# Altium PCB BMS PCB.PcbDoc (part 1 of 2)
Units mm, origin at the board's own origin, x right, y up, seen from the top; angles counter-clockwise.
Board outline 90 x 100 mm, 4 copper layers (Top Layer, Layer 1, Layer 2, Bottom Layer), stack 0.603 mm thick; 82 components, 43 nets, 216 pads, 71 vias.
Unrouted connection lines stored in the file: 2.
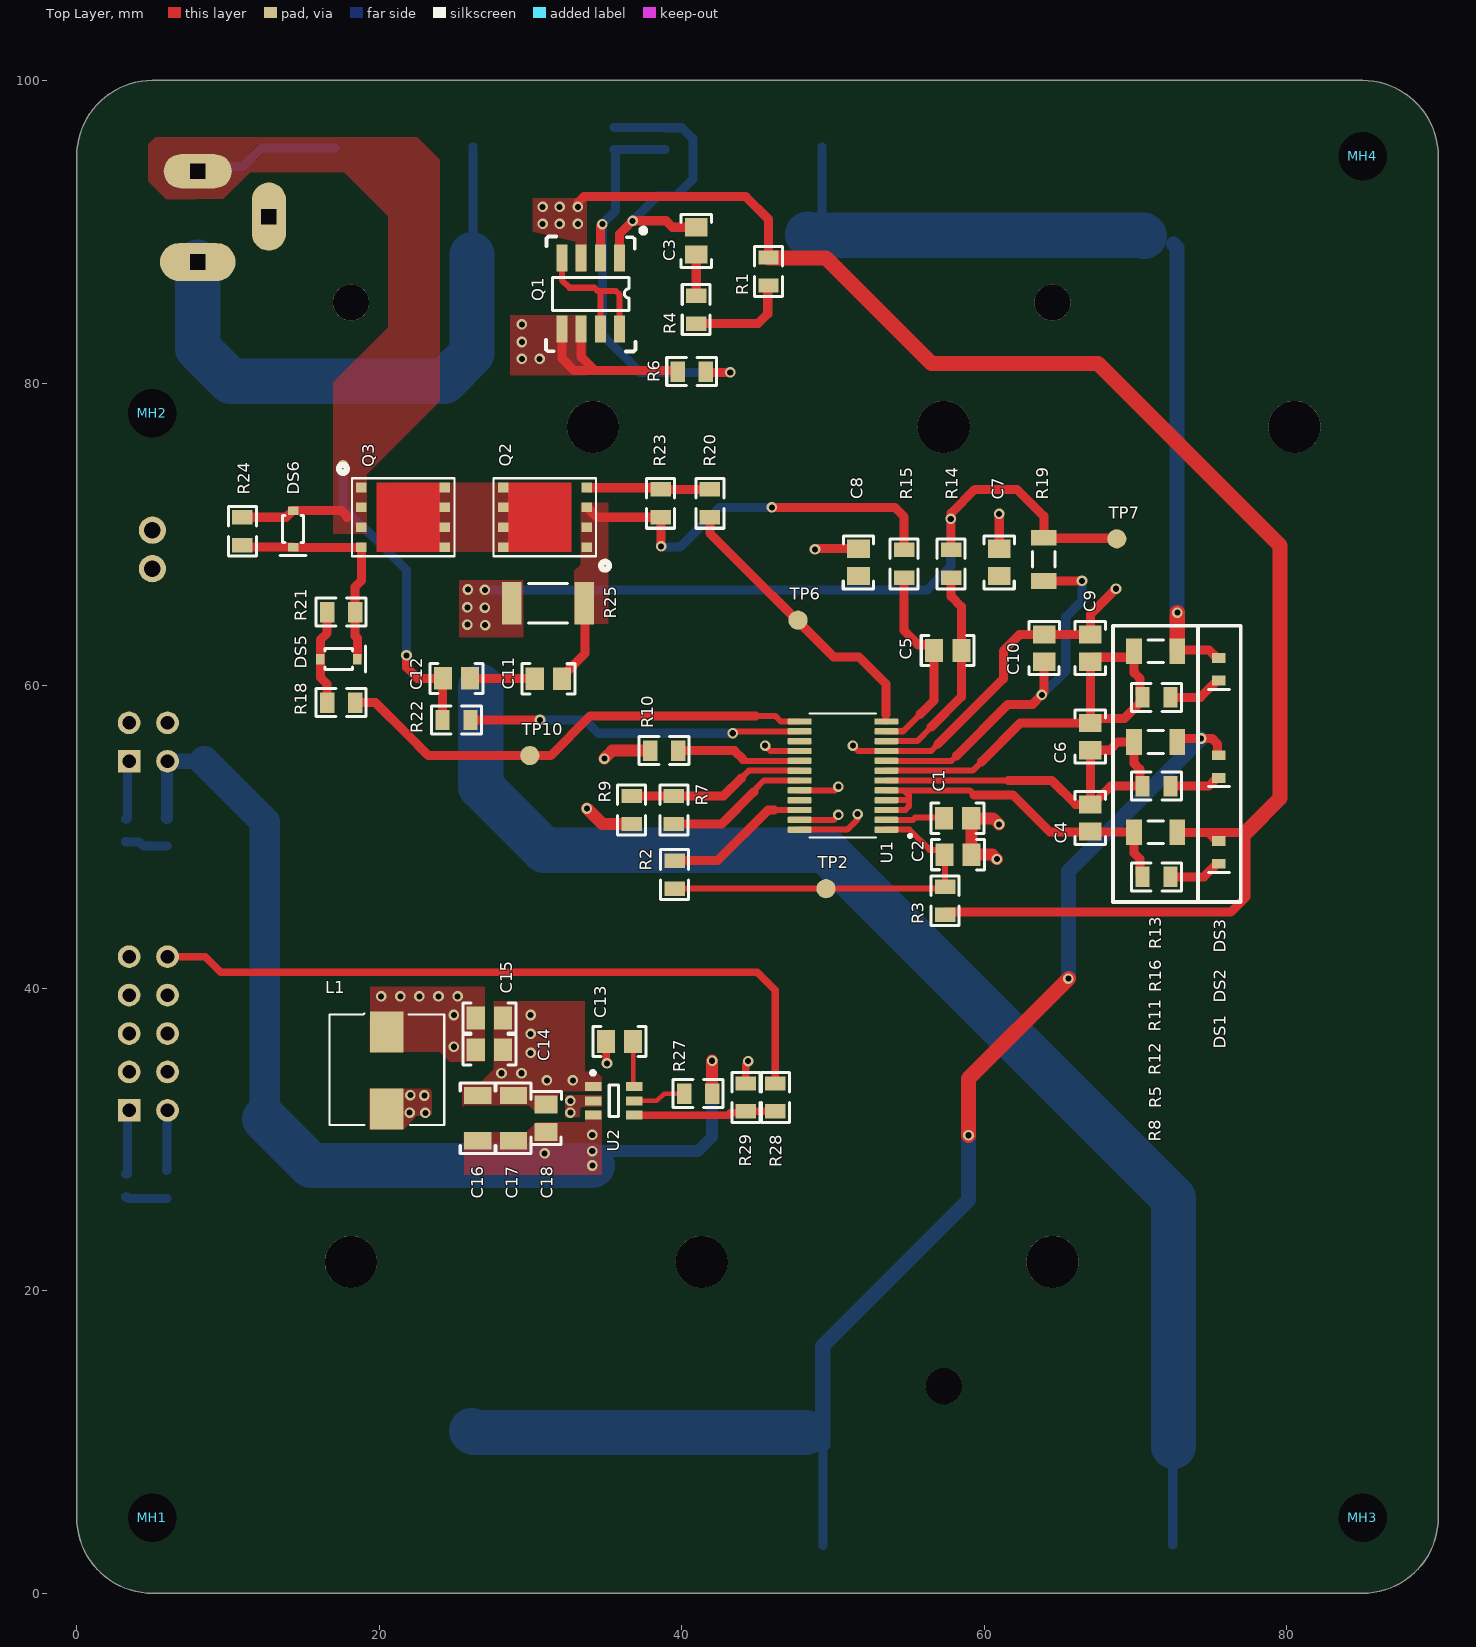
[diagram p0: Top Layer view]
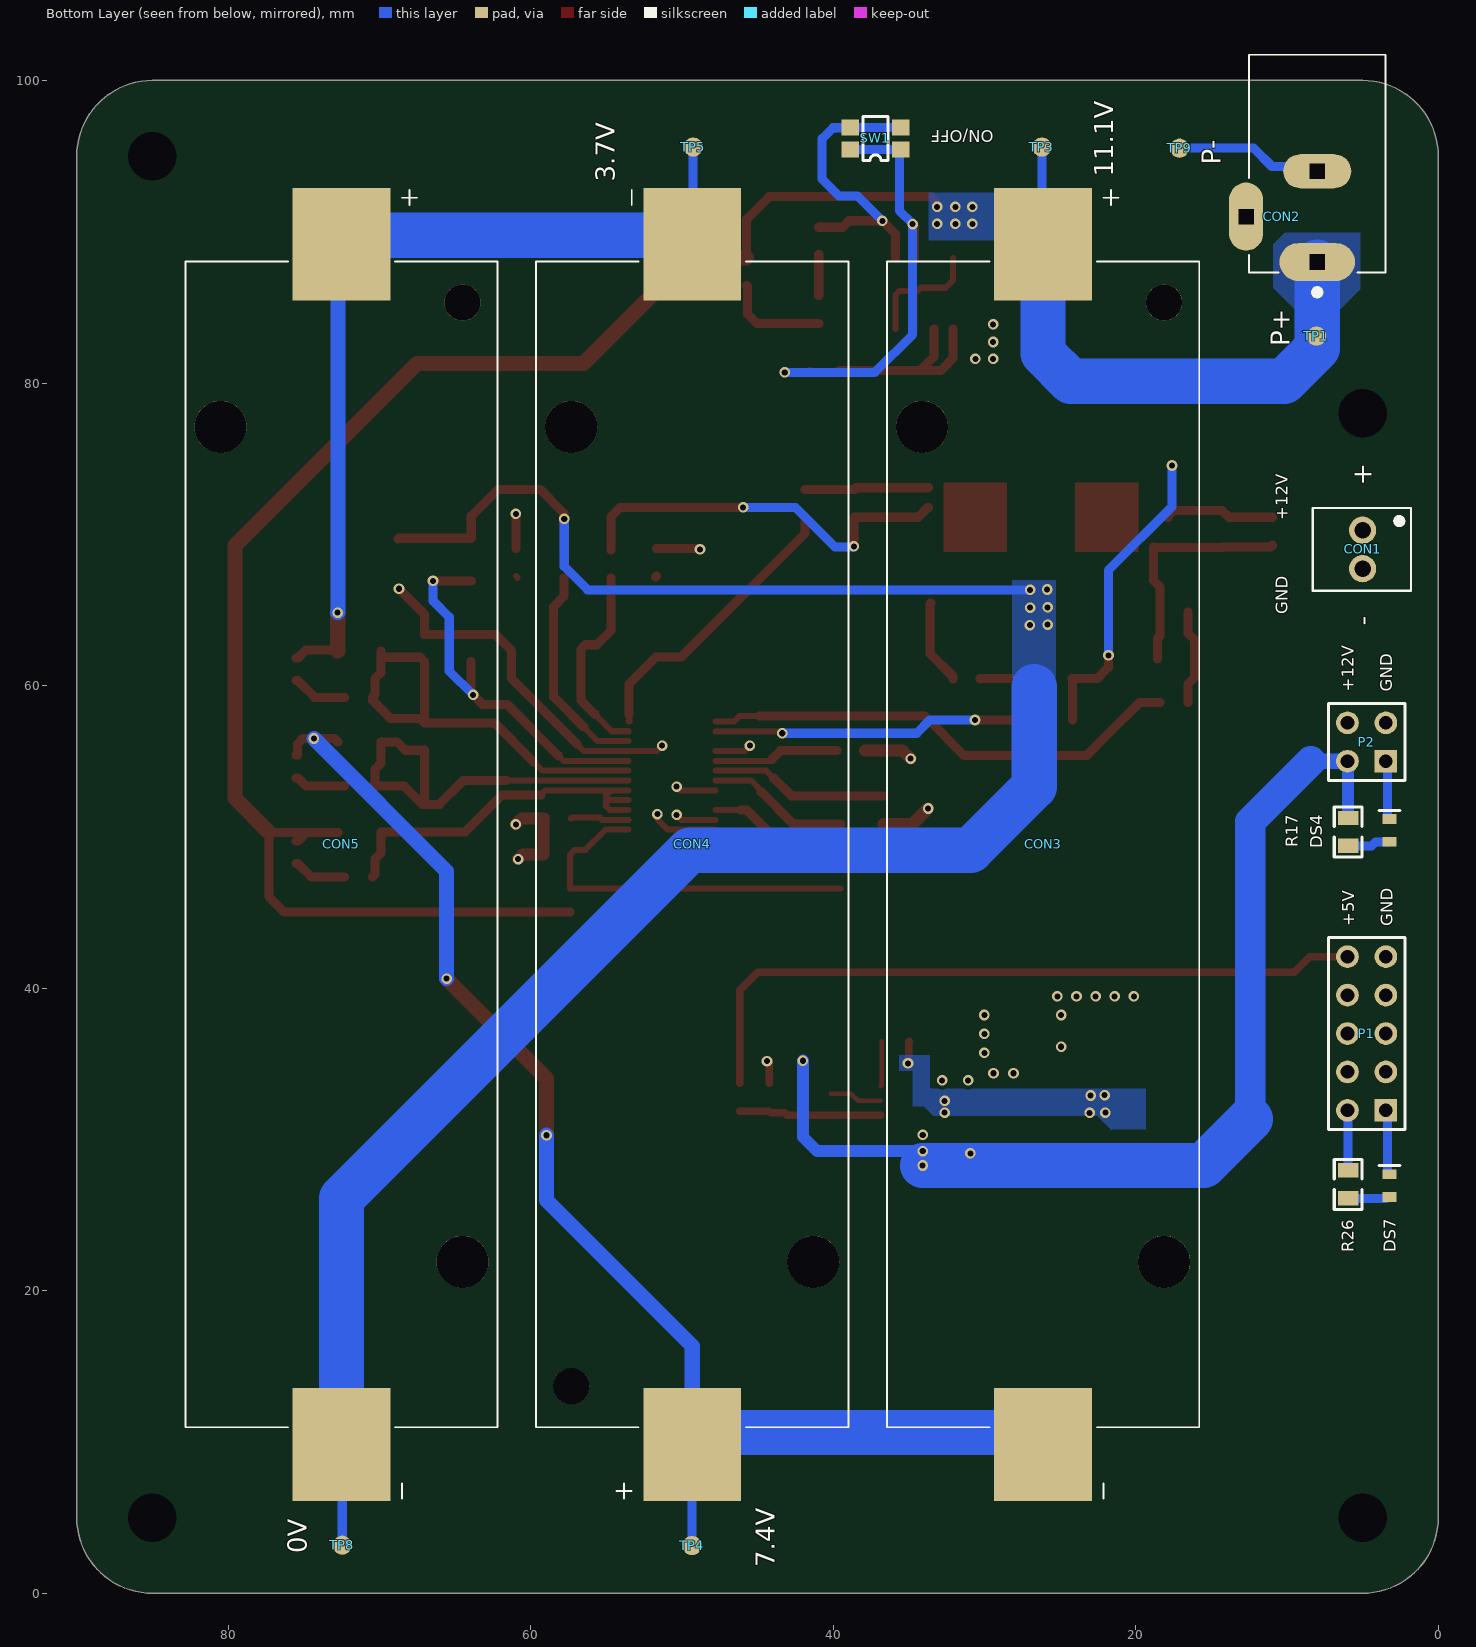
[diagram p1: Bottom Layer view, seen from below]
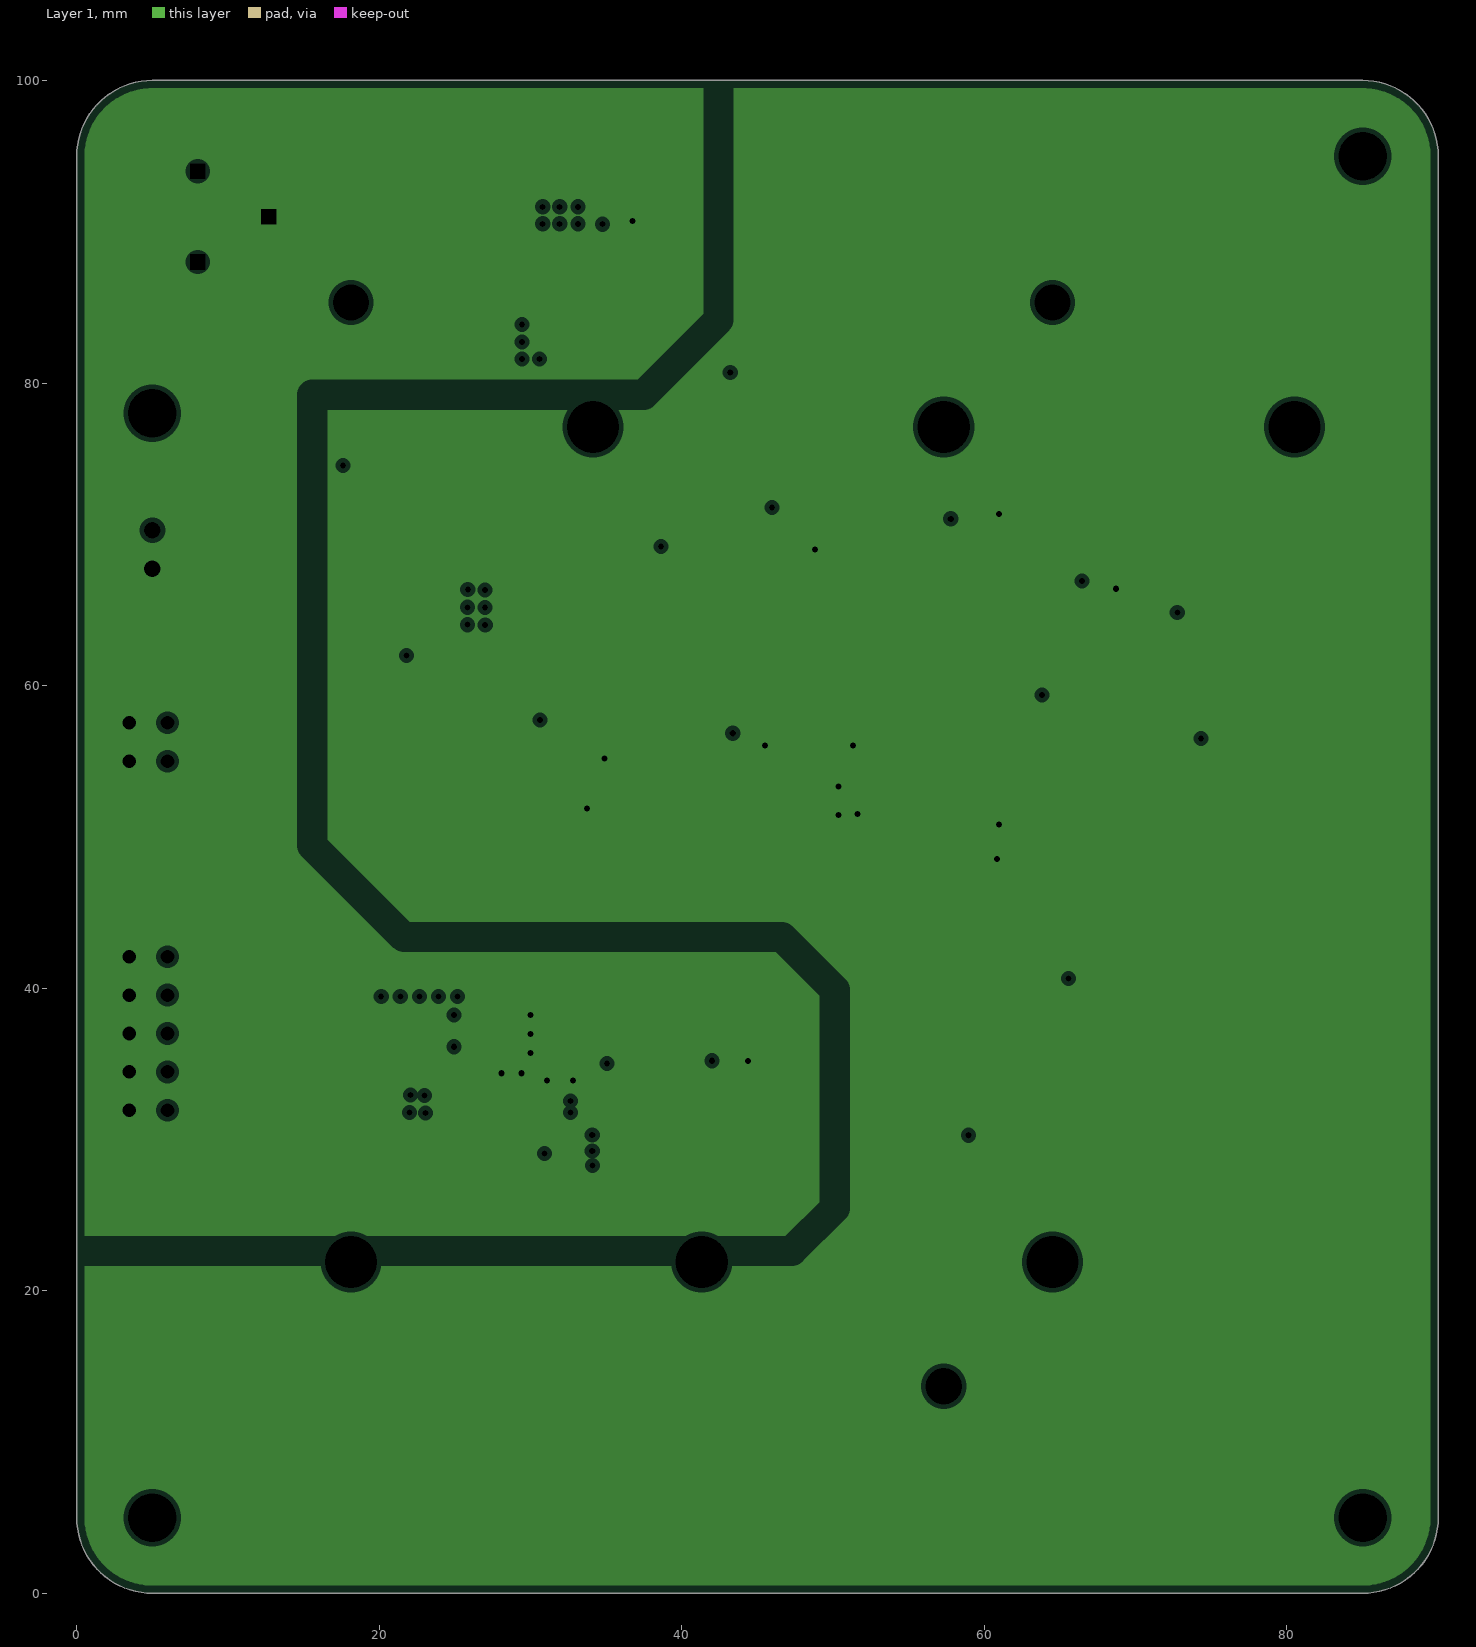
[diagram p2: Layer 1, clearances drawn from the general rule]
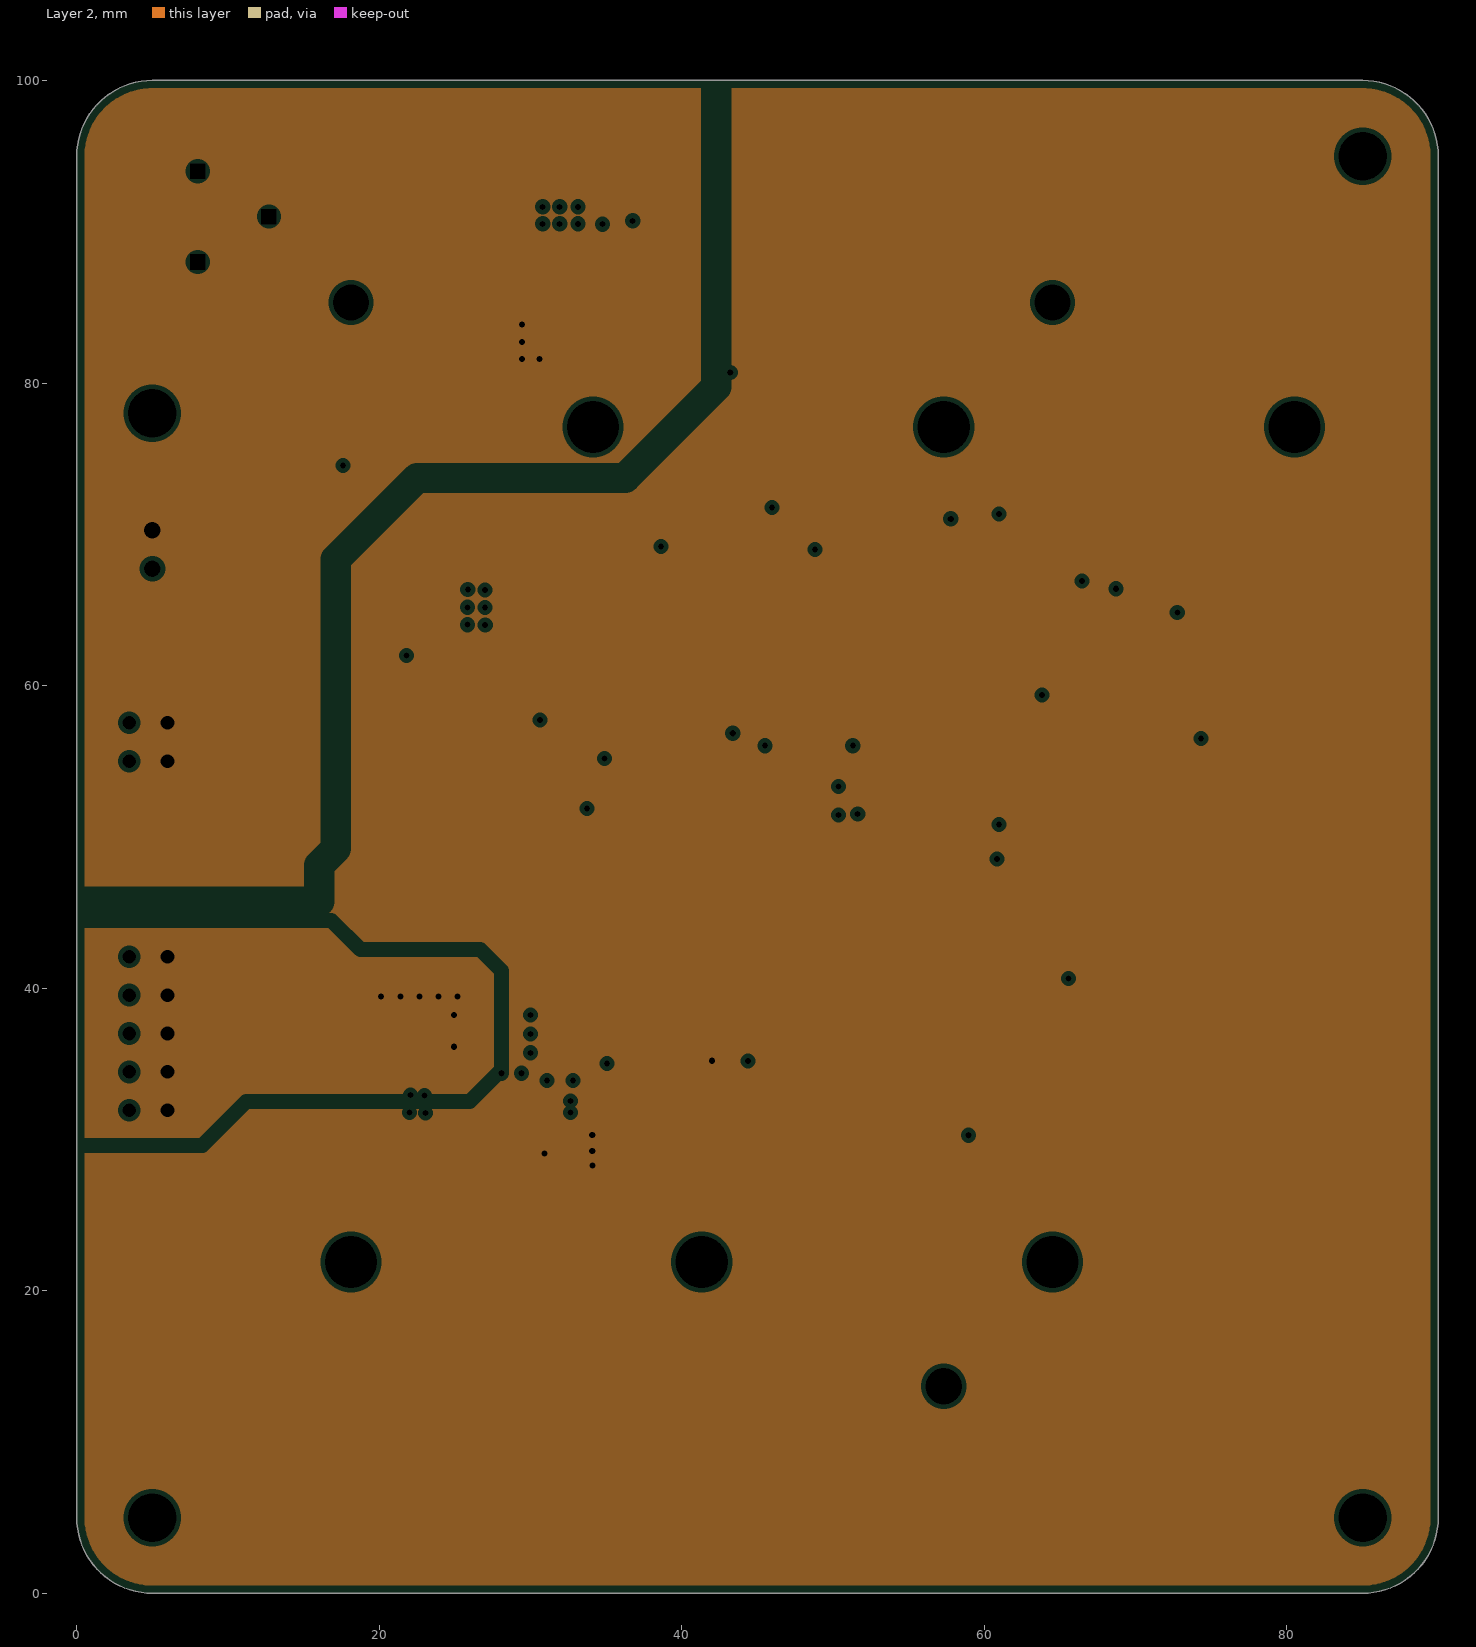
[diagram p3: Layer 2, clearances drawn from the general rule]
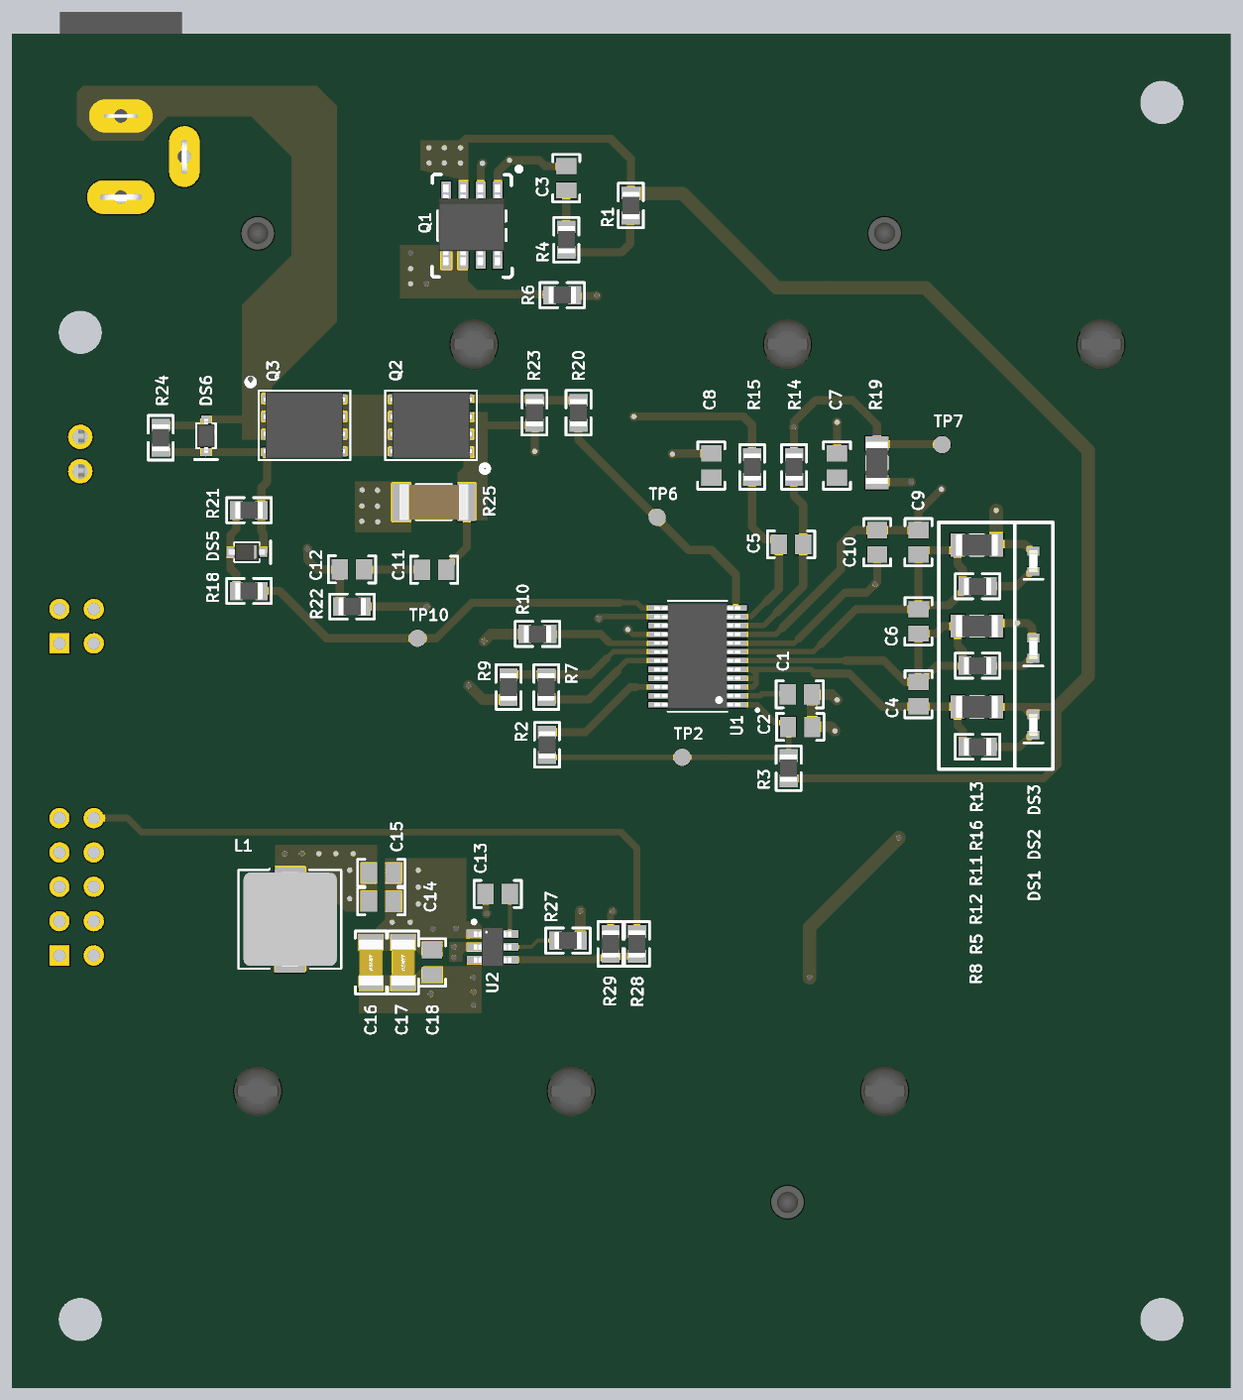
[diagram p4: 3D render of the assembled board from above, using the file's embedded part models]
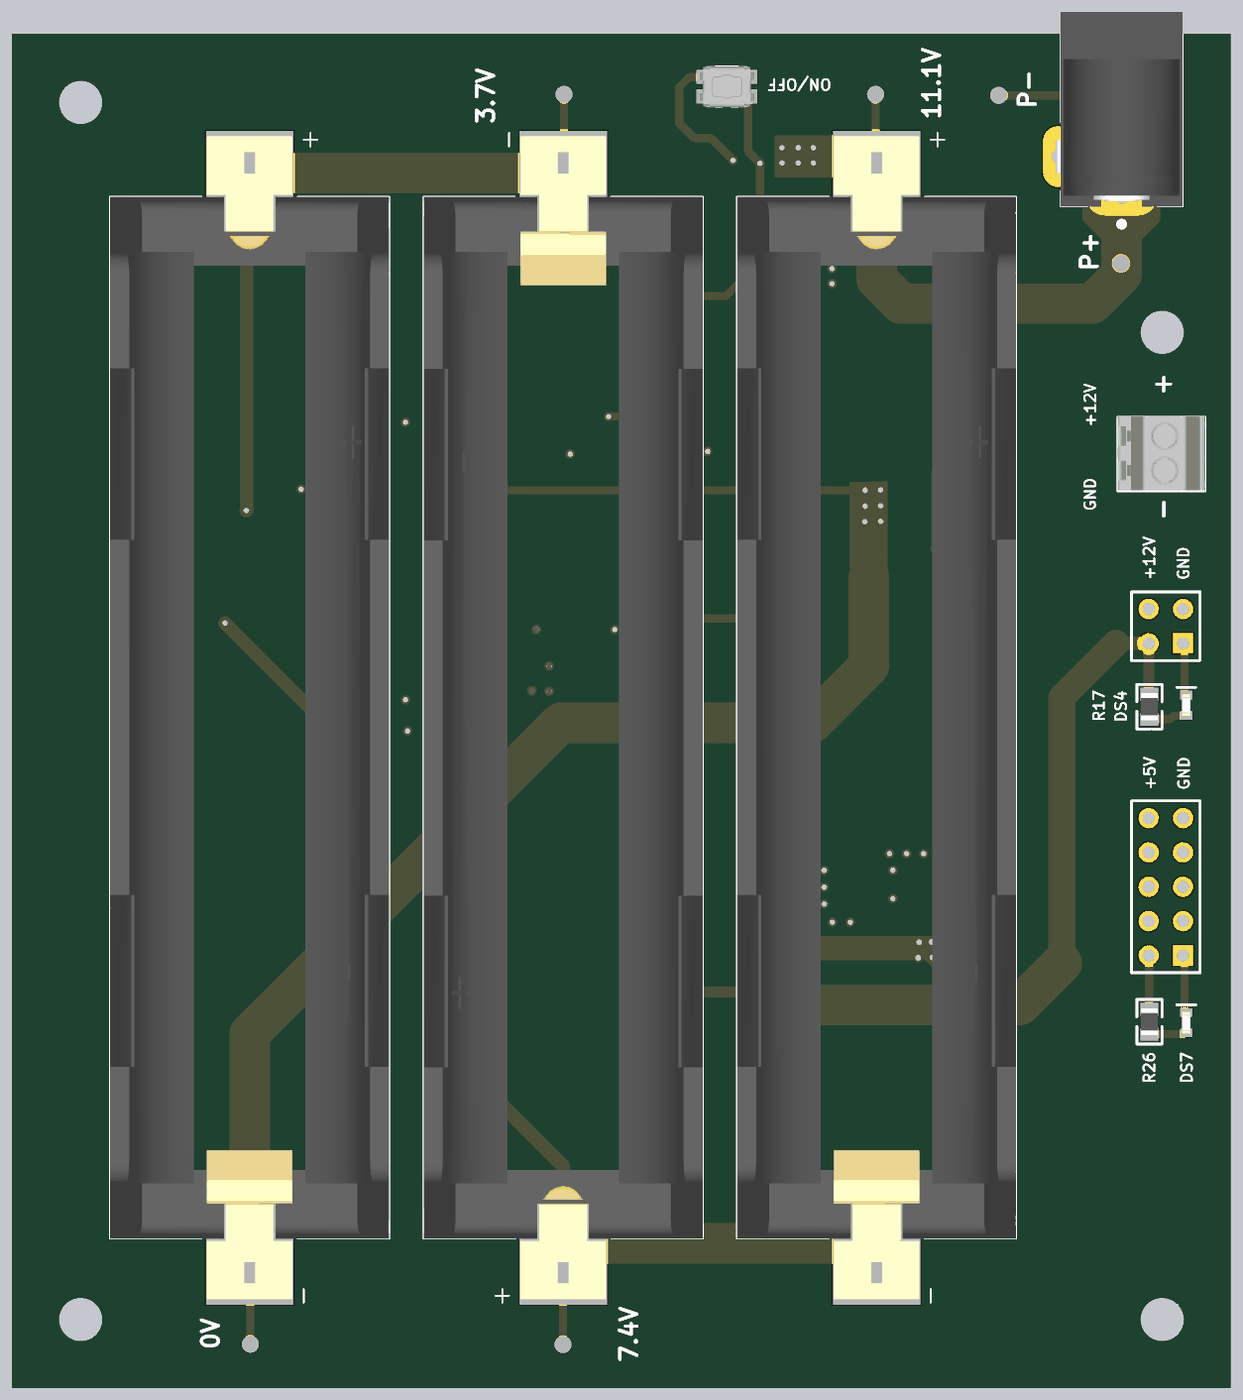
[diagram p5: 3D render of the assembled board from below, using the file's embedded part models]

## Layer stack, top to bottom
Top Solder: solder mask 0.0102, Solder Resist, Dk 3.5
Top Layer: signal copper 0.0356
Dielectric 2: prepreg 0.0711, PP-006, Dk 4.1
Layer 1: plane copper 0.035, net GND
Dielectric 1: dielectric 0.32, FR-4, Dk 4.8
Layer 2: plane copper 0.035, net PackOUT
Dielectric 3: prepreg 0.0711, PP-006, Dk 4.1
Bottom Layer: signal copper 0.0356
Bottom Solder: solder mask 0.0102, Solder Resist, Dk 3.5

## Board outline
0,5 ccw(c5,5) 5,0 85,0 ccw(c85,5) 90,5 90,95 ccw(c85,95) 85,100 5,100 ccw(c5,95) 0,95

## Design rules (kind name [scope] priority, off if disabled: settings)
Clearance [All] p1: gap=0.254 ignorepadtopadclearanceinfootprint=TRUE except(0: Arc-Hole Track-Hole SMDPad-Hole THPad-Hole Via-Hole Fill-Hole Poly-Hole Region-Hole Text-Hole; 0.152: Arc-Arc Arc-Track Arc-SMDPad Track-Track Track-SMDPad SMDPad-SMDPad)
HoleSize [All] p1: absolutevalues=TRUE maxlimit=6 minlimit=0.4 maxpercent=80.000 minpercent=20.000
MinimumSolderMaskSliver [All] p1: minsoldermaskwidth=0.15
PlaneClearance [All] p1: clearance=0.3
PlaneConnect [All] p1: planeconnectstyle=Direct reliefexpansion=0.508 reliefentries=4 reliefconductorwidth=0.254 reliefairgap=0.254
PolygonConnect [All] p1: connectstyle=Direct reliefconductorwidth=0.254 reliefentries=4 polygonreliefangle="90 Angle" airgapwidth=0.254
RoutingVias [All] p1: holewidth=0.4 width=0.7 viastyle="Through Hole" minholewidth=0.2 minwidth=0.4 maxholewidth=1 maxwidth=1.27
SilkToSilkClearance [All] p1: silktosilkclearance=0.15
SilkToSolderMaskClearance [IsPad] p1: minsilkscreentomaskgap=0.15 clearancetoexposedcopper=TRUE
SolderMaskExpansion [All] p1: expansion=0.102 istentingtop=FALSE
Width [All] p1: maxlimit=5 minlimit=0.2 preferedwidth=0.254
24 further rules are at their usual default settings.

## Components (designator, comment, footprint, x,y, rotation, side; value= is the part's Value field where it differs from the comment)
C1 "1uF" CAP_0805 58.225,51.225 r180 top
C2 "1uF" CAP_0805 58.25,48.825 r0 top
C3 "1uF" CAP_0805 40.95,89.4 r270 top
C4 "1uF" CAP_0805 67,51.25 r270 top
C5 "0.1uF" CAP_0805 57.575,62.325 r0 top
C6 "1uF" CAP_0805 67,56.625 r270 top
C7 "0.1uF" CAP_0805 60.978,68.15 r270 top
C8 "0.1uF" CAP_0805 51.675,68.15 r270 top
C9 "1uF" CAP_0805 67,62.475 r270 top
C10 "1uF" CAP_0805 63.95,62.475 r270 top
C11 "0.1uF" CAP_0805 31.175,60.45 r0 top
C12 "0.1uF" CAP_0805 25.1,60.475 r0 top
C13 "0.1uF" CAP_0805 35.875,36.475 r0 top
C14 "22uF" CAP_0805 27.272,35.925 r180 top
C15 "22uF" CAP_0805 27.272,38.025 r180 top
C16 "10uF" CAP_1206 26.5,31.4 r90 top
C17 "10uF" CAP_1206 28.875,31.4 r90 top
C18 "0.1uF" CAP_0805 31.025,31.4 r90 top
CON1 "1800001" CON_ED_2POS_TH_2.54mm 5,69 r0 bottom
CON2 "PJ-002A" CUI_PJ-002A 8,88 r90 bottom
CON3 "1042P" 1042P 26.125,49.5 r90 bottom locked
CON4 "1042P" 1042P 49.313,49.5 r270 bottom locked
CON5 "1042P" 1042P 72.5,49.5 r90 bottom locked
DS1 "HSMS-C190" LED_0603 76.9,48.975 r270 top
DS2 "HSMS-C190" LED_0603 76.9,54.65 r270 top
DS3 "HSMS-C190" LED_0603 76.9,61.075 r270 top
DS4 "HSMG-C190" LED_0603 4.625,50.425 r90 bottom
DS5 "BAS16J,135" SOD323F 17.325,61.75 r0 top
DS6 "MMXZ5246B-TP" "SOD323 Zener" 14.3,70.35 r270 top
DS7 "HSMG-C190" LED_0603 4.625,26.95 r90 bottom
L1 "3.3uH" "Non-Standard_IND 744311330" 20.5,34.55 r180 top
MH1 "MH_3mm" MH_3mm 5,5 r0 top
MH2 "MH_3mm" MH_3mm 5,78 r0 top
MH3 "MH_3mm" MH_3mm 85,5 r0 top
MH4 "MH_3mm" MH_3mm 85,95 r0 top
P1 "Header 5X2" HDR2X5 3.46,31.92 r90 bottom
P2 "Header 2X2" HDR2X2 3.46,55 r90 bottom
Q1 "IRF7319TRPBF" SO-8_IRF7319 33.975,85.925 r270 top
Q2 "CSD18534Q5A" Q5A 30.95,71.125 r180 top
Q3 "CSD18534Q5A" Q5A 21.57,71.125 r0 top
R1 "10K" RES_0805 45.725,87.375 r90 top
R2 "10K" RES_0805 39.525,47.5 r270 top
R3 "1K" RES_0805 57.4,45.775 r90 top
R4 "100K" RES_0805 40.95,84.85 r270 top
R5 "49.9R" RES_1206 71.325,50.3 r180 top
R6 "10K" RES_0805 40.65,80.75 r180 top
R7 "10K" RES_0805 39.475,51.775 r90 top
R8 "1K" RES_0805 71.375,47.35 r180 top
R9 "10K" RES_0805 36.675,51.775 r270 top
R10 "100K" RES_0805 38.825,55.7 r180 top
R11 "49.9R" RES_1206 71.325,56.275 r180 top
R12 "1K" RES_0805 71.375,53.35 r180 top
R13 "49.9R" RES_1206 71.325,62.275 r180 top
R14 "100R" RES_0805 57.796,68.048 r270 top
R15 "100R" RES_0805 54.695,68.048 r270 top
R16 "1K" RES_0805 71.375,59.225 r180 top
R17 "10K" RES_0805 5.95,50.325 r90 bottom
R18 "5.1K" RES_0805 17.473,58.875 r0 top
R19 "49.9R" RES_1206 63.925,68.35 r270 top
R20 "5.1K" RES_0805 41.85,72.05 r270 top
R21 "1M" RES_0805 17.473,64.85 r180 top
R22 "470K" RES_0805 25.1,57.725 r0 top
R23 "10M" RES_0805 38.6,72.05 r90 top
R24 "3M" RES_0805 10.95,70.202 r270 top
R25 "0.01R" RES_2010 31.15,65.45 r0 top
R26 "1K" RES_0805 5.95,27.025 r270 bottom
R27 "10K" RES_0805 41.075,33.025 r180 top
R28 "54.9K" RES_0805 46.175,32.775 r90 top
R29 "10K" RES_0805 44.225,32.775 r270 top
SW1 "EVP-AA602W" "SW_Tactile_SPDT EVP-AA602W" 37.2,96.15 r0 bottom
TP1 "Test Point SMD Round 1.27mm" "Test Point Round 1.27mm" 8.05,83.1 r0 bottom net-tie
TP2 "Test Point SMD Round 1.27mm" "Test Point Round 1.27mm" 49.525,46.575 r180 top net-tie
TP3 "Test Point SMD Round 1.27mm" "Test Point Round 1.27mm" 26.2,95.6 r0 bottom net-tie
TP4 "Test Point SMD Round 1.27mm" "Test Point Round 1.27mm" 49.325,3.15 r0 bottom net-tie
TP5 "Test Point SMD Round 1.27mm" "Test Point Round 1.27mm" 49.25,95.6 r0 bottom net-tie
TP6 "Test Point SMD Round 1.27mm" "Test Point Round 1.27mm" 47.675,64.325 r180 top net-tie
TP7 "Test Point SMD Round 1.27mm" "Test Point Round 1.27mm" 68.75,69.7 r180 top net-tie
TP8 "Test Point SMD Round 1.27mm" "Test Point Round 1.27mm" 72.45,3.175 r0 bottom net-tie
TP9 "Test Point SMD Round 1.27mm" "Test Point Round 1.27mm" 17.1,95.525 r0 bottom net-tie
TP10 "Test Point SMD Round 1.27mm" "Test Point Round 1.27mm" 29.95,55.375 r90 top net-tie
U1 "BQ7791500PWR" TSSOP24 50.65,54.05 r180 top
U2 "TPS562201DDCR" "SOT-23-6 Thin" 35.5,32.55 r0 top

## Footprints (in the part's own frame and the unit in brackets; to place one, negate y for a bottom-side part, rotate by r counter-clockwise, add the part's x,y. Pads: shape width x height; smd on the part's side, far side on the other; paste and mask are expansions set on the pad)
1042P [mm]
  rect 7.46x6.47 smd: 1(39.67,0) 2(-39.67,0)
  round 3.45 hole 3.45 unplated: ""(-27.6,-8) ""(27.6,8)
  round 2.39 hole 2.39 unplated: ""(35.82,-8)
  silkscreen extent -43.25,-10.32 43.25,10.33, body extent -43,-10.33 43,10.33, height 14.86
CAP_0805 [mm] "Chip Capacitor, 2-Leads, Body 2.10x1.35mm, IPC Medium Density"
  rect 1.2x1.5 smd mask+0.05: 1(-0.9,0) 2(0.9,0)
  silkscreen extent -1.75,-1.01 1.75,1, body extent -1.1,-0.73 1.1,0.73, height 1.25
CAP_1206 [mm]
  rect 1.15x1.8 smd mask+0.05: 1(-1.5,0) 2(1.5,0)
  silkscreen extent -2.32,-1.15 2.32,1.15, body extent -1.7,-0.9 1.7,0.9, height 1.8
CON_ED_2POS_TH_2.54mm [mm]
  round 1.8 hole 1.1: 1(0,-1.27) 2(0,1.27)
  silkscreen extent -3.2,-2.74 3.3,2.74, body extent -3.19,-2.8 3.31,2.68, height 8.5
CUI_PJ-002A [mm]
  oval 2.5x5 hole 1 square: 1(0,0)
  oval 2.25x4.5 hole 1 square: 2(6,0)
  oval 4.5x2.25 hole 1 square: 3(3,4.7)
  silkscreen extent -2.2,-4.5 13.7,4.5, body extent -0.7,-4.5 13.7,4.9, height 11
HDR2X2 [mm] "Connector; Header; 2x2 Position"
  rect 1.5x1.5 hole 0.9: 1(0,0)
  round 1.5 hole 0.9: 2(0,2.54) 3(2.54,0) 4(2.54,2.54)
  silkscreen extent -1.27,-1.27 3.81,3.81
HDR2X5 [mm] "Connector; Header; 5x2 Position"
  rect 1.5x1.5 hole 0.9: 1(0,0)
  round 1.5 hole 0.9: 2(0,2.54) 3(2.54,0) 4(2.54,2.54) 5(5.08,0) 6(5.08,2.54) 7(7.62,0) 8(7.62,2.54) 9(10.16,0) 10(10.16,2.54)
  silkscreen extent -1.27,-1.27 11.43,3.81
LED_0603 [mm] "Chip Capacitor 0603, 2-Leads, Body 1.68x0.88mm, IPC Medium Density"
  rect 0.65x0.9 smd mask+0.05: 1(-0.75,-1.4) 2(0.75,-1.4)
  silkscreen extent 1.33,-2.1 1.33,-0.7, body extent -0.8,-1.7 0.8,-1.1, height 1
MH_3mm [mil]
  round 60 hole 125.98 unplated: 1(0,0)
"Non-Standard_IND 744311330" [mm]
  rect 2.2x2.7 smd: 1(0,-2.55) 2(0,2.55)
  silkscreen extent -3.8,-3.77 3.8,3.6, body extent -3.47,-3.55 3.43,3.45, height 4
Q5A [mm] "CSD18534Q5A"
  rect 0.7x0.65 smd: 1(-2.752,1.98) 2(-2.752,0.66) 3(-2.752,-0.66) 4(-2.752,-1.98) 5(2.753,-1.98) 6(2.753,-0.66) 7(2.753,0.66) 8(2.753,1.98)
  Top Layer region: 2.448,2.305 -1.752,2.305 -1.752,-2.305 2.448,-2.305
  silkscreen extent -4.24,-2.58 3.4,3.46, body extent -3,-2.45 3,2.45, height 1.1
RES_0805 [mm]
  rect 0.95x1.35 smd mask+0.05: 1(-0.925,0) 2(0.925,0)
  silkscreen extent -1.65,-0.92 1.65,0.92, body extent -1,-0.62 1,0.63, height 0.6
RES_1206 [mm]
  rect 1.05x1.7 smd: 1(-1.425,0) 2(1.425,0)
  silkscreen extent -0.5,-0.75 0.5,0.75, body extent -1.55,-0.8 1.55,0.8, height 0.66
RES_2010 [mm]
  rect 1.3x2.8 smd: 1(-2.4,0) 2(2.4,0)
  silkscreen extent -1.3,-1.3 1.3,1.3, body extent -2.55,-1.32 2.55,1.32, height 0.66
SO-8_IRF7319 [mm]
  rect 1.78x0.72 smd: 1(-2.34,1.905) 2(-2.34,0.635) 3(-2.34,-0.635) 4(-2.34,-1.905) 5(2.34,-1.905) 6(2.34,-0.635) 7(2.34,0.635) 8(2.34,1.905)
  silkscreen extent -4.3,-2.95 3.84,3.63, body extent -3.02,-2.47 2.98,2.43, height 1.75
"SOD323 Zener" [mm]
  rect 0.56x0.69 smd: 1(-1.22,0) 2(1.22,0)
  silkscreen extent -0.9,-0.85 1.75,0.85, body extent -1.25,-0.65 1.25,0.65, height 1.2
SOD323F [mm]
  rect 0.56x0.69 smd: 1(-1.22,0) 2(1.22,0)
  silkscreen extent -0.9,-0.85 1.75,0.85, body extent -1.35,-0.67 1.35,0.67, height 0.82
"SOT-23-6 Thin" [mm] "TPS562201DDCR,"
  rect 1.1x0.6 smd mask+0.05: 1(-1.35,0.95) 2(-1.35,0) 3(-1.35,-0.95) 4(1.35,-0.95) 5(1.35,0) 6(1.35,0.95)
  silkscreen extent -1.5,-1.05 0.3,1.97, body extent -1.4,-1.45 1.4,1.45, height 1.1
"SW_Tactile_SPDT EVP-AA602W" [mm]
  rect 1.15x1.05 smd mask+0.05: 1(-1.675,0.7) 1'(1.675,0.7) 2(-1.675,-0.75) 2'(1.675,-0.75)
  silkscreen extent -0.82,-1.48 0.82,1.42, body extent -2.15,-1.58 2.15,1.53, height 1.7
"Test Point Round 1.27mm" [mm]
  round 1.27 smd mask+0.05: 1(0,0)
TSSOP24 [mm]
  rrect25% 1.57x0.41 smd: 1(-2.87,3.575) 2(-2.87,2.925) 3(-2.87,2.275) 4(-2.87,1.625) 5(-2.87,0.975) 6(-2.87,0.325) 7(-2.87,-0.325) 8(-2.87,-0.975) 9(-2.87,-1.625) 10(-2.87,-2.275) 11(-2.87,-2.925) 12(-2.87,-3.575) 13(2.87,-3.575) 14(2.87,-2.925) 15(2.87,-2.275) 16(2.87,-1.625) 17(2.87,-0.975) 18(2.87,-0.325) 19(2.87,0.325) 20(2.87,0.975) 21(2.87,1.625) 22(2.87,2.275) 23(2.87,2.925) 24(2.87,3.575)
  silkscreen extent -4.54,-4.1 2.2,4.1, body extent -3.2,-3.9 3.2,3.9, height 1.2

## Part data
C1 C2 C4 C6 C9 C10: library part CAP_1uF_16V_20%_0805, "Cap, 1UF, 16V, Mlcc, 0805;", Case/Package=0805, Manufacturer=KEMET, Manufacturer Part Number=C0805C105Z4VAC7210, Max Operating Temperature=85°C, Min Operating Temperature=-30°C, Tolerance=80%, Voltage Rating=16V, Capacitance=1uF, Category="Ceramic Capacitors", Manufacturer 2=KEMET, Manufacturer 3=KEMET, Manufacturer Part Number 2=C0805C105Z4VAC7210, Manufacturer Part Number 3=C0805C105Z4VAC7210, Mount="Surface Mount", Pricing 1="1=0.12, 10=0.079, 50=0.079, 100=0.037, 1000=0.022, 10000=0.017 (USD)", Pricing 2="1=0.1, 10=0.075, 50=0.0424, 100=0.0351, 500=0.0246, 1000=0.02036, 2500=0.01895, 5000=0.01734 (USD)", Pricing 3="1=0.12, 10=0.079, 50=0.079, 100=0.037, 1000=0.022, 10000=0.016 (USD)", RoHS=Yes, RoHS Compliant=Yes, Series="SMD Comm Y5V", Stock 1=28110, Stock 2=109336, Stock 3=14106, Supplier 1=Mouser, Supplier 2=Digi-Key, Supplier 3=Mouser
C3: library part CAP_1uF_50V_10%_0805, "Multilayer Ceramic Capacitor, 1 uF, 50 V, ± 10%, X7R, 0805 [2012 Metric]", Case Code (Imperial)=0805, Case Code (Metric)=2012, Dielectric=X7R, Dielectric Material=Ceramic, Manufacturer=KEMET, Manufacturer Part Number=C0805C105K5RACTU, Max Operating Temperature=125°C, Min Operating Temperature=-55°C, Package Quantity=1, Tolerance=10%, Voltage=50V, Capacitance=1uF, Case/Package=0805, Category="Ceramic Capacitors", ComponentLink1Description=https://datasheet.ciiva.com/7842/1732744-7842192.pdf?src-supplier=Element14, ComponentLink1URL=https://datasheet.ciiva.com/7842/1732744-7842192.pdf?src-supplier=Element14, ComponentLink2Description=https://datasheet.ciiva.com/22700/1851736-22700523.pdf?src-supplier=Element14, ComponentLink2URL=https://datasheet.ciiva.com/22700/1851736-22700523.pdf?src-supplier=Element14, ComponentLink3Description=https://datasheet.ciiva.com/5408/kem-c1002-x7r-smd-5408569.pdf?src-supplier=Mouser, ComponentLink3URL=https://datasheet.ciiva.com/5408/kem-c1002-x7r-smd-5408569.pdf?src-supplier=Mouser, Construction=Flat, Depth=1.25mm, Height=1.25mm, Length=2mm, Manufacturer 2=KEMET, Manufacturer Part Number 2=C0805C105K5RACTU, Mount="Surface Mount,PCB", Packaging="Tape and Reel", Pricing 1="1=0.33, 10=0.171, 50=0.171, 100=0.11, 1000=0.092, 10000=0.076 (USD)", Pricing 2="1=0.33, 10=0.231, 50=0.162, 100=0.1388, 500=0.10412, 1000=0.08792 (USD)", Reach SVHC Compliant=No, RoHS=Yes, RoHS Compliant=Yes, Series=C, Stock 1=246479, Stock 2=167514, Supplier 1=Mouser, Supplier 2=Digi-Key, Termination=SMD/SMT, Thickness=0.055inch, Voltage Rating=50V, Voltage Rating (DC)=50V, Width=0.049inch
C5 C7 C8 C11 C12: library part CAP_0.1uF_16V_10%_0805, "Multilayer Ceramic Capacitor, 0.1 uF, 16 V, ± 10%, X7R, 0805 [2012 Metric]", Capacitance=100nF, Case Code (Imperial)=0805, Case Code (Metric)=2012, Dielectric=X7R, Dielectric Material=Ceramic, Manufacturer=KEMET, Manufacturer Part Number=C0805C104K4RACTU, Max Operating Temperature=125°C, Min Operating Temperature=-55°C, Package Quantity=4000, Tolerance=10%, Voltage=16V, Case/Package=0805, Category="Ceramic Capacitors", ComponentLink1Description=https://datasheet.ciiva.com/46443/1851736-46443711.pdf?src-supplier=Element14, ComponentLink1URL=https://datasheet.ciiva.com/46443/1851736-46443711.pdf?src-supplier=Element14, ComponentLink2Description=https://datasheet.ciiva.com/46443/1851736-46443710.pdf?src-supplier=Element14, ComponentLink2URL=https://datasheet.ciiva.com/46443/1851736-46443710.pdf?src-supplier=Element14, Construction=Flat, Contact Plating=Tin,Matte, Depth=1.25mm, Height=0.9mm, Lead Pitch=0.75mm, Length=2mm, Manufacturer 2=KEMET, Manufacturer 3=KEMET, Manufacturer Part Number 2=C0805C104K4RACTU, Manufacturer Part Number 3=C0805C104K4RACTU, Mount="Surface Mount,PCB", Number of Pins=2, Packaging="Tape and Reel", Pricing 1="1=0.15, 10=0.078, 50=0.078, 100=0.044, 1000=0.03, 10000=0.023 (USD)", Pricing 2="1=0.18, 10=0.13, 50=0.0736, 100=0.061, 500=0.04274, 1000=0.03539 (USD)", Pricing 3="1=0.17, 10=0.078, 50=0.078, 100=0.045, 1000=0.032, 10000=0.023 (USD)", Radiation Hardening=No, Reach SVHC Compliant=No, RoHS=Yes, RoHS Compliant=Yes, Series="SMD Comm X7R", Stock 1=90803, Stock 2=179111, Stock 3=60653, Supplier 1=Mouser, Supplier 2=Digi-Key, Supplier 3=Mouser, Supplier Part Number 3=80-C0805C104K4R, Termination=SMD/SMT, Voltage Rating=16V, Voltage Rating (DC)=16V
C13 C18: library part CAP_0.1uF_50V_10%_0805, "SMD Comm X7R 0805 (2012Metric) Ceramic Capacitor 0.079Lx0.049W 2.00mmx1.25mm X7R ±10% 0.1muF", Capacitance=100nF, Case Code (Imperial)=0805, Case Code (Metric)=2012, Dielectric=X7R, Dielectric Material=Ceramic, Manufacturer=KEMET, Manufacturer Part Number=C0805C104K5RAC7210, Max Operating Temperature=125°C, Min Operating Temperature=-55°C, Package Quantity=15000, Tolerance=10%, Voltage Rating=50V, Case/Package=0805, Category="Ceramic Capacitors", ComponentLink1Description=http://www.farnell.com/datasheets/2750461.pdf?src-supplier=Farnell, ComponentLink1URL=http://www.farnell.com/datasheets/2750461.pdf?src-supplier=Farnell, ComponentLink2Description=http://www.mouser.com/ds/2/212/KEM_C1002_X7R_SMD-1102033.pdf?src-supplier=Mouser, ComponentLink2URL=http://www.mouser.com/ds/2/212/KEM_C1002_X7R_SMD-1102033.pdf?src-supplier=Mouser, ComponentLink3Description=http://components.arrow.com/part/dataview/1379060S8109168N7429?src-supplier=Arrow+Electronics, ComponentLink3URL=http://components.arrow.com/part/dataview/1379060S8109168N7429?src-supplier=Arrow+Electronics, ComponentLink4Description=http://capacitoredge.kemet.com/capedge2/DataSheet/Datasheet-C0805C104K5RAC7210.pdf?pn=C0805C104K5RAC7210&src-supplier=Avnet, ComponentLink4URL=http://capacitoredge.kemet.com/capedge2/DataSheet/Datasheet-C0805C104K5RAC7210.pdf?pn=C0805C104K5RAC7210&src-supplier=Avnet, ComponentLink5Description=http://www.farnell.com/datasheets/2750461.pdf?src-supplier=Newark, ComponentLink5URL=http://www.farnell.com/datasheets/2750461.pdf?src-supplier=Newark, ComponentLink6Description=http://www.farnell.com/datasheets/2750461.pdf?src-supplier=Element14, ComponentLink6URL=http://www.farnell.com/datasheets/2750461.pdf?src-supplier=Element14, ComponentLink7Description=https://api.kemet.com/component-edge/download/datasheet/C0805C104K5RAC7210.pdf?src-supplier=Digi-Key, ComponentLink7URL=https://api.kemet.com/component-edge/download/datasheet/C0805C104K5RAC7210.pdf?src-supplier=Digi-Key, ComponentLink8Description=https://www.verical.com/server-webapp/html/getDatasheet?partID=114317&src-supplier=Verical, ComponentLink8URL=https://www.verical.com/server-webapp/html/getDatasheet?partID=114317&src-supplier=Verical, ComponentLink9Description=http://www.kemet.com/kemet/web/homepage/kechome.nsf/weben/C4DA2DA1D1C9D3C3CA2570A50016092D/$file/KEM_C1002_X7R_SMD.pdf, ComponentLink9URL=http://www.kemet.com/kemet/web/homepage/kechome.nsf/weben/C4DA2DA1D1C9D3C3CA2570A50016092D/$file/KEM_C1002_X7R_SMD.pdf, ComponentLink10Description=https://datasheet.octopart.com/C0805C104K5RAC7210-KEMET-datasheet-130259742.pdf?src-supplier=TME, ComponentLink10URL=https://datasheet.octopart.com/C0805C104K5RAC7210-KEMET-datasheet-130259742.pdf?src-supplier=TME, ComponentLink11Description=https://datasheet.octopart.com/C0805C104K5RAC7210-KEMET-datasheet-37550250.pdf?src-supplier=Electro+Sonic, ComponentLink11URL=https://datasheet.octopart.com/C0805C104K5RAC7210-KEMET-datasheet-37550250.pdf?src-supplier=Electro+Sonic, Construction=Flat, Depth=1.25mm, Height=0.9mm, Lead Pitch=0.75mm, Length=2mm, Manufacturer 2=KEMET, Manufacturer 3=KEMET, Manufacturer Part Number 2=C0805C104K5RAC7210, Manufacturer Part Number 3=C0805C104K5RAC7210, Mount="Surface Mount", Packaging="Tape and Reel", Pricing 1="1=0.13, 10=0.055, 50=0.055, 100=0.032, 1000=0.024, 10000=0.024 (USD)", Pricing 2="1=0.13, 10=0.092, 50=0.052, 100=0.0431, 500=0.03022, 1000=0.02502, 2500=0.02328, 5000=0.0213 (USD)", Pricing 3="1=0.13, 10=0.055, 50=0.055, 100=0.032, 1000=0.024, 10000=0.018 (USD)", Radiation Hardening=No, RoHS=Yes, RoHS Compliant=Yes, Series=C, Stock 1=173866, Stock 2=1684433, Stock 3=170881, Supplier 1=Mouser, Supplier 2=Digi-Key, Supplier 3=Mouser, Supplier Part Number 3=80-C0805C104K5R7210, Termination=SMD/SMT, Thickness=0.035inch, Voltage Rating (DC)=50V, Width=0.049inch
C14 C15: library part CAP_22uF-25V-20%-0805, "0805 25 V 22 uF ±20% Tolerance X5R Monolithic Ceramic Chip Capacitor", Case Code (Imperial)=0805, Case Code (Metric)=2012, Dielectric=X5R, Manufacturer="Murata Electronics", Manufacturer 1=Murata, Manufacturer Part Number=GRM21BR61E226ME44K, Max Operating Temperature=85°C, Min Operating Temperature=-55°C, Package Quantity=10000, Supplier Part Number 1=490-14661-1-ND, Tolerance=20%, Voltage Rating=25V, Capacitance=22uF, Case/Package=0805, Category="Ceramic Capacitors", ComponentLink1Description=http://www.mouser.com/ds/2/281/c02e-2905.pdf?src-supplier=Mouser, ComponentLink1URL=http://www.mouser.com/ds/2/281/c02e-2905.pdf?src-supplier=Mouser, ComponentLink2Description=http://search.murata.co.jp/Ceramy/image/img/A01X/G101/ENG/GRM21BR61E226ME44-01.pdf?src-supplier=Digi-Key, ComponentLink2URL=http://search.murata.co.jp/Ceramy/image/img/A01X/G101/ENG/GRM21BR61E226ME44-01.pdf?src-supplier=Digi-Key, ComponentLink3Description=https://search.murata.co.jp/Ceramy/image/img/A01X/G101/ENG/GRM21BR61E226ME44-01.pdf?src-supplier=Digi-Key, ComponentLink3URL=https://search.murata.co.jp/Ceramy/image/img/A01X/G101/ENG/GRM21BR61E226ME44-01.pdf?src-supplier=Digi-Key, Height=1.25mm, Length=0.079inch, Manufacturer Part Number 1=GRM21BR61E226ME44K, Mount="Surface Mount", Packaging="Tape and Reel", Pricing 1="1=0.3, 10=0.205, 50=0.1436, 100=0.1231, 500=0.09234, 1000=0.07798, 2500=0.07387, 5000=0.06977 (USD)", RoHS=Yes, RoHS Compliant=Yes, Series=GRM, Stock 1=809289, Supplier 1=Digi-Key, Supplier-1=Digikey, Termination=SMD/SMT, Thickness=0.057inch, Voltage Rating (DC)=25V, Weight=0.000335oz, Width=1.25mm
C16 C17: library part CAP_10uF_25V_10%_1206, "Multilayer Ceramic Capacitor, 10 uF, 25 V, ± 10%, X5R, 1206 [3216 Metric]", Case Code (Imperial)=1206, Case Code (Metric)=3216, Dielectric=X5R, Manufacturer 1=KEMET, Manufacturer Part Number 1=C1206C106K3PACTU, Max Operating Temperature=85°C, Min Operating Temperature=-55°C, Supplier Part Number 1=399-C1206C106K3PAC7800DKR-ND, Tolerance=10%, Voltage Rating=25V, Capacitance=10uF, Case/Package=1206, Category="Ceramic Capacitors", ComponentLink1Description=http://www.farnell.com/datasheets/2739687.pdf?src-supplier=Farnell, ComponentLink1URL=http://www.farnell.com/datasheets/2739687.pdf?src-supplier=Farnell, ComponentLink2Description=https://www.verical.com/server-webapp/html/getDatasheet?partID=385834&src-supplier=Verical, ComponentLink2URL=https://www.verical.com/server-webapp/html/getDatasheet?partID=385834&src-supplier=Verical, ComponentLink3Description=http://www.onlinecomponents.com/productFiles/mf-KEM/kem_c1006_x5r_smd.pdf?src-supplier=Onlinecomponents.com, ComponentLink3URL=http://www.onlinecomponents.com/productFiles/mf-KEM/kem_c1006_x5r_smd.pdf?src-supplier=Onlinecomponents.com, ComponentLink4Description=http://datasheet.octopart.com/C1206C106K3PAC-TU-Kemet-datasheet-5314969.pdf?src-supplier=Onlinecomponents.com, ComponentLink4URL=http://datasheet.octopart.com/C1206C106K3PAC-TU-Kemet-datasheet-5314969.pdf?src-supplier=Onlinecomponents.com, ComponentLink5Description=http://www.farnell.com/datasheets/2739687.pdf?src-supplier=Newark, ComponentLink5URL=http://www.farnell.com/datasheets/2739687.pdf?src-supplier=Newark, ComponentLink6Description=https://api.kemet.com/component-edge/download/datasheet/C1206C106K3PACTU.pdf?src-supplier=Digi-Key, ComponentLink6URL=https://api.kemet.com/component-edge/download/datasheet/C1206C106K3PACTU.pdf?src-supplier=Digi-Key, ComponentLink7Description=http://datasheet.octopart.com/C1206C106K3PAC-TU-Kemet-datasheet-5314969.pdf?src-supplier=Mouser, ComponentLink7URL=http://datasheet.octopart.com/C1206C106K3PAC-TU-Kemet-datasheet-5314969.pdf?src-supplier=Mouser, ComponentLink8Description=http://datasheet.octopart.com/C1206C106K3PAC-TU-Kemet-datasheet-5314969.pdf?src-supplier=Digi-Key, ComponentLink8URL=http://datasheet.octopart.com/C1206C106K3PAC-TU-Kemet-datasheet-5314969.pdf?src-supplier=Digi-Key, ComponentLink9Description=http://datasheet.octopart.com/C1206C106K3PAC-TU-Kemet-datasheet-5314969.pdf?src-supplier=Verical, ComponentLink9URL=http://datasheet.octopart.com/C1206C106K3PAC-TU-Kemet-datasheet-5314969.pdf?src-supplier=Verical, ComponentLink10Description=http://datasheet.octopart.com/C1206C106K3PAC-TU-Kemet-datasheet-5314969.pdf?src-supplier=Avnet, ComponentLink10URL=http://datasheet.octopart.com/C1206C106K3PAC-TU-Kemet-datasheet-5314969.pdf?src-supplier=Avnet, ComponentLink11Description=https://datasheet.octopart.com/C1206C106K3PACTU-Kemet-datasheet-10978831.pdf?src-supplier=Newark, ComponentLink11URL=https://datasheet.octopart.com/C1206C106K3PACTU-Kemet-datasheet-10978831.pdf?src-supplier=Newark, ComponentLink12Description=http://datasheet.octopart.com/C1206C106K3PAC-TU-Kemet-datasheet-5314969.pdf?src-supplier=Distrelec, ComponentLink12URL=http://datasheet.octopart.com/C1206C106K3PAC-TU-Kemet-datasheet-5314969.pdf?src-supplier=Distrelec, ComponentLink13Description=http://www.farnell.com/datasheets/2739687.pdf?src-supplier=Element14, ComponentLink13URL=http://www.farnell.com/datasheets/2739687.pdf?src-supplier=Element14, ComponentLink14Description=https://datasheet.octopart.com/C1206C106K3PACTU-Kemet-datasheet-22084244.pdf?src-supplier=Element14, ComponentLink14URL=https://datasheet.octopart.com/C1206C106K3PACTU-Kemet-datasheet-22084244.pdf?src-supplier=Element14, ComponentLink15Description=http://datasheet.octopart.com/C1206C106K3PAC-TU-Kemet-datasheet-5314969.pdf?src-supplier=Rs, ComponentLink15URL=http://datasheet.octopart.com/C1206C106K3PAC-TU-Kemet-datasheet-5314969.pdf?src-supplier=Rs, ComponentLink16Description=http://datasheet.octopart.com/C1206C106K3PAC-TU-Kemet-datasheet-5314969.pdf?src-supplier=LCSC, ComponentLink16URL=http://datasheet.octopart.com/C1206C106K3PAC-TU-Kemet-datasheet-5314969.pdf?src-supplier=LCSC, ComponentLink17Description=https://datasheet.octopart.com/C1206C106K3PAC7800-KEMET-datasheet-165611373.pdf?src-supplier=TME, ComponentLink17URL=https://datasheet.octopart.com/C1206C106K3PAC7800-KEMET-datasheet-165611373.pdf?src-supplier=TME, ComponentLink18Description=http://datasheet.octopart.com/C1206C106K3PAC-TU-Kemet-datasheet-5314969.pdf?src-supplier=NAC+Semi, ComponentLink18URL=http://datasheet.octopart.com/C1206C106K3PAC-TU-Kemet-datasheet-5314969.pdf?src-supplier=NAC+Semi, ComponentLink19Description=http://datasheet.octopart.com/C1206C106K3PAC-TU-Kemet-datasheet-5314969.pdf?src-supplier=Quest, ComponentLink19URL=http://datasheet.octopart.com/C1206C106K3PAC-TU-Kemet-datasheet-5314969.pdf?src-supplier=Quest, ComponentLink20Description=http://datasheet.octopart.com/C1206C106K3PAC-TU-Kemet-datasheet-5314969.pdf?src-supplier=TTI, ComponentLink20URL=http://datasheet.octopart.com/C1206C106K3PAC-TU-Kemet-datasheet-5314969.pdf?src-supplier=TTI, ComponentLink21Description=https://datasheet.octopart.com/C1206C106K3PACTU-KEMET-datasheet-134136060.pdf?src-supplier=Electro+Sonic, ComponentLink21URL=https://datasheet.octopart.com/C1206C106K3PACTU-KEMET-datasheet-134136060.pdf?src-supplier=Electro+Sonic, Contact Plating=154ConductorMaterial, Depth=1.6mm, Dissipation Factor=5%, Lead Free=5697LeadFree, Length=3.2mm, Material=4241ConductorMaterial, Mount="Surface Mount", Number of Pins=2NUMBER, Packaging="Tape and Reel", Pricing 1="1=0.35, 10=0.243, 50=0.17, 100=0.1457, 500=0.1093, 1000=0.09229 (USD)", Radiation Hardening=No, Reach SVHC Compliant=4186SVHC, RoHS=Yes, RoHS Compliant=Yes, Series="SMD Comm X5R", Stock 1=101746, Supplier 1=Digi-Key, Thickness=1.8034mm, Voltage Rating (AC)=25V, Voltage Rating (DC)=25V, Width=1.6002mm
CON1: library part "CON_ED_2-pos_2.54mm_Phoenix Contact", "PCB Terminal Screw 2.54mm 20AWG 160V 6A 2 Position Combicon Control Series", Manufacturer 1="Phoenix Contact", Supplier Part Number 1=277-17216-ND, Category="Terminal Blocks", ComponentLink1Description=http://www.mouser.com/ds/2/324/ItemDetail_1800001-929782.pdf?src-supplier=Mouser, ComponentLink1URL=http://www.mouser.com/ds/2/324/ItemDetail_1800001-929782.pdf?src-supplier=Mouser, ComponentLink2Description=http://components.arrow.com/part/dataview/46117015S71155N1555?src-supplier=Arrow+Electronics, ComponentLink2URL=http://components.arrow.com/part/dataview/46117015S71155N1555?src-supplier=Arrow+Electronics, ComponentLink3Description=https://media.digikey.com/pdf/Data%20Sheets/Phoenix%20Contact%20PDFs/1800001.pdf?src-supplier=Digi-Key, ComponentLink3URL=https://media.digikey.com/pdf/Data%20Sheets/Phoenix%20Contact%20PDFs/1800001.pdf?src-supplier=Digi-Key, Manufacturer Part Number 1=1800001, Pricing 1="1=1.45, 10=1.408, 50=1.3156, 100=1.2104, 250=1.11828, 500=1.1154 (USD)", RoHS=Yes, Stock 1=169, Supplier 1=Digi-Key
CON2: library part CON_ED_DC-JACK_RA_PJ-002A, "2.0 x 6.5 mm, 2.5 A, Horizontal, Through Hole, Dc Power Jack Connector", Manufacturer 1="CUI Devices", Supplier Part Number 1=CP-002A-ND, Category="Power Connectors", ComponentLink1Description=https://datasheet.octopart.com/PJ-002A-CUI-datasheet-37357.pdf?src-supplier=Digi-Key, ComponentLink1URL=https://datasheet.octopart.com/PJ-002A-CUI-datasheet-37357.pdf?src-supplier=Digi-Key, ComponentLink2Description=https://datasheet.octopart.com/PJ-002A-CUI-Devices-datasheet-137760667.pdf?src-supplier=Future+Electronics, ComponentLink2URL=https://datasheet.octopart.com/PJ-002A-CUI-Devices-datasheet-137760667.pdf?src-supplier=Future+Electronics, ComponentLink3Description=https://datasheet.octopart.com/PJ-002A-CUI-Devices-datasheet-103108261.pdf?src-supplier=Electro+Sonic, ComponentLink3URL=https://datasheet.octopart.com/PJ-002A-CUI-Devices-datasheet-103108261.pdf?src-supplier=Electro+Sonic, ComponentLink4Description=https://datasheet.octopart.com/PJ-002A-CUI-Devices-datasheet-141000101.pdf?src-supplier=Master+Electronics, ComponentLink4URL=https://datasheet.octopart.com/PJ-002A-CUI-Devices-datasheet-141000101.pdf?src-supplier=Master+Electronics, Manufacturer Part Number 1=PJ-002A, Pricing 1="1=0.7, 25=0.5692, 100=0.5037, 500=0.43708, 2500=0.33482, 10000=0.31654 (USD)", RoHS=Yes, Stock 1=67885, Supplier 1=Digi-Key
CON3 CON4 CON5: library part CON_18650_BATT, "Cylindrical Battery Contacts, Clips, Holders & Springs SMT Polarized Holder for 18650 Battery", Manufacturer 1="Keystone Electronics", Supplier Part Number 1=36-1042P-ND, Category="Batteries and Accessories", ComponentLink1Description=http://www.farnell.com/datasheets/2067690.pdf?src-supplier=Farnell, ComponentLink1URL=http://www.farnell.com/datasheets/2067690.pdf?src-supplier=Farnell, ComponentLink2Description=http://www.mouser.com/ds/2/215/042P-744096.pdf?src-supplier=Mouser, ComponentLink2URL=http://www.mouser.com/ds/2/215/042P-744096.pdf?src-supplier=Mouser, ComponentLink3Description=http://www.farnell.com/datasheets/2067690.pdf?src-supplier=Newark, ComponentLink3URL=http://www.farnell.com/datasheets/2067690.pdf?src-supplier=Newark, ComponentLink4Description=http://keyelco.com/product-pdf.cfm?p=13957&src-supplier=Digi-Key, ComponentLink4URL=http://keyelco.com/product-pdf.cfm?p=13957&src-supplier=Digi-Key, ComponentLink5Description=https://datasheet.octopart.com/1042P-Keystone-datasheet-65568923.pdf?src-supplier=Element14, ComponentLink5URL=https://datasheet.octopart.com/1042P-Keystone-datasheet-65568923.pdf?src-supplier=Element14, ComponentLink6Description=https://datasheet.octopart.com/1042P-Keystone-datasheet-159767845.pdf?src-supplier=TME, ComponentLink6URL=https://datasheet.octopart.com/1042P-Keystone-datasheet-159767845.pdf?src-supplier=TME, Manufacturer Part Number 1=1042P, Pricing 1="1=5.34, 25=4.4896, 100=3.7118, 250=3.41128, 500=3.19918, 1000=2.98708, 2500=2.70428, 5000=2.1 (USD)", RoHS=No, Stock 1=25811, Supplier 1=Digi-Key
DS1 DS2 DS3: library part LED_Red_0603_2.2V_HSMS-C190, "LED Low-Power Uni-Color Red 630nm 2.1V 2-Pin Chip LED T/R", Manufacturer="Broadcom Avago", Supplier Part Number 1=516-1422-1-ND, Category=LEDs, Manufacturer Part Number=HSMS-C190, Pricing 1="1=0.41, 10=0.272, 100=0.1813, 500=0.12542, 1000=0.10452, 2000=0.09407 (USD)", RoHS=Yes, Stock 1=190765, Supplier 1=Digi-Key
DS4 DS7: library part LED_Green_0603_2.2V_HSMG-C190, "Green 572nm LED Indication - Discrete 2.2V 0603 (1608 Metric)", Manufacturer="Broadcom Avago", Supplier Part Number 1=516-1425-1-ND, Category=LEDs, ComponentLink1Description=https://datasheet.ciiva.com/15117/getdatasheetpartid-110413-15117483.pdf?src-supplier=Verical, ComponentLink1URL=https://datasheet.ciiva.com/15117/getdatasheetpartid-110413-15117483.pdf?src-supplier=Verical, ComponentLink2Description=https://datasheet.ciiva.com/11773/0900766b80ad69c9-11773861.pdf?src-supplier=Rs, ComponentLink2URL=https://datasheet.ciiva.com/11773/0900766b80ad69c9-11773861.pdf?src-supplier=Rs, ComponentLink3Description=https://datasheet.ciiva.com/31395/1487342-31395358.pdf?src-supplier=Farnell, ComponentLink3URL=https://datasheet.ciiva.com/31395/1487342-31395358.pdf?src-supplier=Farnell, ComponentLink4Description=https://datasheet.ciiva.com/29280/180659-da-01-en-chip-led-hsmg-c190-gelb-gruen-29280615.pdf?src-supplier=Conrad, ComponentLink4URL=https://datasheet.ciiva.com/29280/180659-da-01-en-chip-led-hsmg-c190-gelb-gruen-29280615.pdf?src-supplier=Conrad, ComponentLink5Description=https://datasheet.ciiva.com/14172/swseriehsmx-c150toc190-e-14172173.pdf?src-supplier=Distrelec, ComponentLink5URL=https://datasheet.ciiva.com/14172/swseriehsmx-c150toc190-e-14172173.pdf?src-supplier=Distrelec, ComponentLink6Description=https://datasheet.ciiva.com/46426/313031-46426519.pdf?src-supplier=Element14, ComponentLink6URL=https://datasheet.ciiva.com/46426/313031-46426519.pdf?src-supplier=Element14, ComponentLink7Description=https://datasheet.ciiva.com/46426/313031-46426520.pdf?src-supplier=Element14, ComponentLink7URL=https://datasheet.ciiva.com/46426/313031-46426520.pdf?src-supplier=Element14, Manufacturer Part Number=HSMG-C190, Pricing 1="1=0.39, 10=0.254, 100=0.1696, 500=0.11732, 1000=0.09776, 2000=0.08799 (USD)", RoHS=Yes, Stock 1=262974, Supplier 1=Digi-Key
DS5: library part DIO_100V_0.25A_SOD-323F, "Rectifier Diode, 1 Phase, 1 Element, 0.25A, 100V V(RRM), Silicon", Average Rectified Current=250mA, Forward Voltage=1.25V, Manufacturer 1=Nexperia, Max Operating Temperature=150°C, Max Power Dissipation=550mW, Max Repetitive Reverse Voltage (Vrrm)=100V, Max Reverse Leakage Current=30nA, Max Surge Current=4A, Min Operating Temperature=-65°C, Supplier Part Number 1=1727-4797-1-ND, Category="Rectifier Diodes", ComponentLink1Description=https://www.mouser.com/ds/2/302/BAS16_SER-471009.pdf?src-supplier=Mouser, ComponentLink1URL=https://www.mouser.com/ds/2/302/BAS16_SER-471009.pdf?src-supplier=Mouser, ComponentLink2Description=https://datasheet.octopart.com/BAS16J%2C135-Nexperia-datasheet-32749520.pdf?src-supplier=Newark, ComponentLink2URL=https://datasheet.octopart.com/BAS16J%2C135-Nexperia-datasheet-32749520.pdf?src-supplier=Newark, ComponentLink3Description=https://datasheet.octopart.com/BAS16J%2C135-Nexperia-datasheet-77871323.pdf?src-supplier=Farnell, ComponentLink3URL=https://datasheet.octopart.com/BAS16J%2C135-Nexperia-datasheet-77871323.pdf?src-supplier=Farnell, ComponentLink4Description=http://www.farnell.com/datasheets/1856332.pdf?src-supplier=Newark, ComponentLink4URL=http://www.farnell.com/datasheets/1856332.pdf?src-supplier=Newark, ComponentLink5Description=https://datasheet.octopart.com/BAS16J%2C135-Nexperia-datasheet-87580831.pdf?src-supplier=Future+Electronics, ComponentLink5URL=https://datasheet.octopart.com/BAS16J%2C135-Nexperia-datasheet-87580831.pdf?src-supplier=Future+Electronics, Element Configuration=5460ElementConfiguration, Forward Current=250mA, Manufacturer Part Number 1=BAS16J,135, Max Reverse Voltage (DC)=100V, Mount=8Mount, Number of Pins=2NUMBER, Packaging=10Packaging, Peak Non-Repetitive Surge Current=4A, Pricing 1="1=0.21, 10=0.19, 100=0.1033, 500=0.06354, 1000=0.04333, 2000=0.03683, 5000=0.03322 (USD)", Radiation Hardening=5898YesNo, Recovery Time=4ns, Reverse Recovery Time=4ns, RoHS=Yes, RoHS Compliant=Yes, Stock 1=212933, Supplier 1=Digi-Key
DS6: library part DIO-Z_16V_200mW_5%_SOD-323, "Diode Zener Single 16V 5% 200mW 2-Pin SOD-323 T/R", Manufacturer 1=MCC, Supplier Part Number 1=353-MMXZ5246B-TPCT-ND, Category="Zener Diodes", ComponentLink1Description=https://datasheet.ciiva.com/17380/mmxz5221b-mmxz5259bsod323-17380682.pdf?src-supplier=Future+Electronics, ComponentLink1URL=https://datasheet.ciiva.com/17380/mmxz5221b-mmxz5259bsod323-17380682.pdf?src-supplier=Future+Electronics, ComponentLink2Description=https://datasheet.ciiva.com/18567/mmxz5221b-mmxz5259bsod323-18567734.pdf?src-supplier=Digi-Key, ComponentLink2URL=https://datasheet.ciiva.com/18567/mmxz5221b-mmxz5259bsod323-18567734.pdf?src-supplier=Digi-Key, ComponentLink3Description=https://datasheet.ciiva.com/15060/mmxz5221b-mmxz5259bsod323-15060347.pdf?src-supplier=Digi-Key, ComponentLink3URL=https://datasheet.ciiva.com/15060/mmxz5221b-mmxz5259bsod323-15060347.pdf?src-supplier=Digi-Key, Manufacturer Part Number 1=MMXZ5246B-TP, Pricing 1="1=0.21, 10=0.195, 100=0.1062, 500=0.06532, 1000=0.04454 (USD)", RoHS=Yes, Stock 1=956, Supplier 1=Digi-Key
L1: library part IND_3.3uH_6.5A_20%_Non-Std, "Power Choke Shielded Wirewound 3.3uH/2.75uH 20% 100KHz 6.5A 17.2mOhm DCR T/R", Case/Package=7040, Current Rating=6.5A, DC Resistance (DCR)=17.2mR, Inductance Tolerance=20%, Manufacturer 1="Wurth Electronics", Manufacturer Part Number 1=744311330, Max Operating Temperature=150°C, Min Operating Temperature=-40°C, Package Quantity=1, Ratings=AEC-Q200, Saturation Current=11A, Self Resonant Frequency=43MHz, Series Resistance=17.2R, Supplier Part Number 1=732-1152-1-ND, Test Frequency=100kHz, Category="Fixed Inductors", ComponentLink1Description=https://datasheet.ciiva.com/7354/744311330-7354374.pdf?src-supplier=Newark, ComponentLink1URL=https://datasheet.ciiva.com/7354/744311330-7354374.pdf?src-supplier=Newark, ComponentLink2Description=https://datasheet.ciiva.com/4954/744311330-68230-4954765.pdf?src-supplier=Mouser, ComponentLink2URL=https://datasheet.ciiva.com/4954/744311330-68230-4954765.pdf?src-supplier=Mouser, ComponentLink3Description=https://datasheet.ciiva.com/7765/1735740-7765007.pdf?src-supplier=Element14, ComponentLink3URL=https://datasheet.ciiva.com/7765/1735740-7765007.pdf?src-supplier=Element14, ComponentLink4Description=https://datasheet.ciiva.com/11801/0900766b80f886ca-11801820.pdf?src-supplier=Rs, ComponentLink4URL=https://datasheet.ciiva.com/11801/0900766b80f886ca-11801820.pdf?src-supplier=Rs, ComponentLink5Description=https://datasheet.ciiva.com/26307/744311330-eng-tds-26307911.pdf?src-supplier=Distrelec, ComponentLink5URL=https://datasheet.ciiva.com/26307/744311330-eng-tds-26307911.pdf?src-supplier=Distrelec, ComponentLink6Description=https://datasheet.ciiva.com/6690/744311330-6690428.pdf?src-supplier=Digi-Key, ComponentLink6URL=https://datasheet.ciiva.com/6690/744311330-6690428.pdf?src-supplier=Digi-Key, ComponentLink7Description=https://datasheet.ciiva.com/6690/744311330-6690426.pdf?src-supplier=Digi-Key, ComponentLink7URL=https://datasheet.ciiva.com/6690/744311330-6690426.pdf?src-supplier=Digi-Key, ComponentLink8Description=https://datasheet.ciiva.com/6690/744311330-6690431.pdf?src-supplier=Digi-Key, ComponentLink8URL=https://datasheet.ciiva.com/6690/744311330-6690431.pdf?src-supplier=Digi-Key, Depth=6.9mm, Height=3.8mm, Height - Seated (Max)=0.157inch, Inductance=3.3uH, Lead Free="Lead Free", Length=7mm, Max DC Current=6.5A, Mount="Surface Mount", Number of Pins=2, Packaging="Tape and Reel", Pricing 1="1=3.8, 10=3.72, 50=3.44, 100=3.29, 500=3.08 (USD)", Reach SVHC Compliant=Unknown, RMS Current (Irms)=6.5A, RoHS=Yes, RoHS Compliant=Yes, Series=WE-HCI, Shielding=Shielded, Stock 1=6645, Supplier 1=Digi-Key, Termination=SMD/SMT, Tolerance=20%, Width=6.9mm
MH1 MH2 MH3 MH4: "Mounting Hole 3mm"
P1: "Header, 5-Pin, Dual row", LatestRevisionDate=17-Jul-2002, LatestRevisionNote="Re-released for DXP Platform.", Publisher="Altium Limited"
P2: "Header, 2-Pin, Dual row", LatestRevisionDate=17-Jul-2002, LatestRevisionNote="Re-released for DXP Platform.", Publisher="Altium Limited"
Q1: library part MOSFET-Dual_P/N-30V, "IRF7319PBF Dual N/P-channel MOSFET Transistor, 4.9 A, 6.5 A, 30 V, 8-Pin SOIC", Manufacturer 1=Infineon, Supplier Part Number 1=IRF7319PBFCT-ND, Category=MOSFETs, ComponentLink1Description=http://www.farnell.com/datasheets/137692.pdf?src-supplier=Farnell, ComponentLink1URL=http://www.farnell.com/datasheets/137692.pdf?src-supplier=Farnell, ComponentLink2Description=http://datasheet.octopart.com/IRF7319TRPBF-Infineon-datasheet-70845.pdf?src-supplier=Farnell, ComponentLink2URL=http://datasheet.octopart.com/IRF7319TRPBF-Infineon-datasheet-70845.pdf?src-supplier=Farnell, ComponentLink3Description=http://datasheet.octopart.com/IRF7319TRPBF-Infineon-datasheet-70845.pdf?src-supplier=Avnet, ComponentLink3URL=http://datasheet.octopart.com/IRF7319TRPBF-Infineon-datasheet-70845.pdf?src-supplier=Avnet, ComponentLink4Description=http://www.farnell.com/datasheets/137692.pdf?src-supplier=Element14, ComponentLink4URL=http://www.farnell.com/datasheets/137692.pdf?src-supplier=Element14, ComponentLink5Description=http://datasheet.octopart.com/IRF7319TRPBF-Infineon-datasheet-70845.pdf?src-supplier=Digi-Key, ComponentLink5URL=http://datasheet.octopart.com/IRF7319TRPBF-Infineon-datasheet-70845.pdf?src-supplier=Digi-Key, ComponentLink6Description=https://www.infineon.com/dgdl/irf7319pbf.pdf?fileId=5546d462533600a4015355f5c82f1b41&src-supplier=Digi-Key, ComponentLink6URL=https://www.infineon.com/dgdl/irf7319pbf.pdf?fileId=5546d462533600a4015355f5c82f1b41&src-supplier=Digi-Key, Manufacturer Part Number 1=IRF7319TRPBF, Pricing 1="1=1.19, 10=0.975, 100=0.7584, 500=0.64284, 1000=0.52366, 2000=0.49297 (USD)", RoHS=Yes, Stock 1=22889, Supplier 1=Digi-Key
Q2 Q3: library part MOSFET-N_60V-50A_VSONP-8, "Trans MOSFET N-CH Si 60V 50A 8-Pin VSONP EP T/R", Manufacturer 1="Texas Instruments", Supplier Part Number 1=296-35583-1-ND, Category=MOSFETs, ComponentLink1Description=https://datasheet.ciiva.com/6376/csd18534q5a-6376034.pdf?src-supplier=Digi-Key, ComponentLink1URL=https://datasheet.ciiva.com/6376/csd18534q5a-6376034.pdf?src-supplier=Digi-Key, ComponentLink2Description=https://datasheet.ciiva.com/7968/1682185-7968226.pdf?src-supplier=Element14, ComponentLink2URL=https://datasheet.ciiva.com/7968/1682185-7968226.pdf?src-supplier=Element14, ComponentLink3Description=https://datasheet.ciiva.com/14423/csd18534q5a-14423450.pdf?src-supplier=Avnet, ComponentLink3URL=https://datasheet.ciiva.com/14423/csd18534q5a-14423450.pdf?src-supplier=Avnet, ComponentLink4Description=https://datasheet.ciiva.com/14423/csd18534q5a-14423451.pdf?src-supplier=Avnet, ComponentLink4URL=https://datasheet.ciiva.com/14423/csd18534q5a-14423451.pdf?src-supplier=Avnet, Manufacturer Part Number 1=CSD18534Q5A, Pricing 1="1=1.03, 10=0.924, 100=0.7201, 500=0.59488, 1000=0.46965 (USD)", RoHS=Yes, Stock 1=8533, Supplier 1=Digi-Key
R1 R2 R6 R7 R9 R17 R27 R29: library part RES_10K_1/8W_1%_0805, "SMD Chip Resistor, 10 kOhm, ± 1%, 125 mW, 0805 [2012 Metric], Thick Film, General Purpose", Case Code (Imperial)=0805, Case Code (Metric)=2012, Manufacturer=Yageo, Manufacturer Part Number=RC0805FR-0710KL, Max Operating Temperature=155°C, Max Power Dissipation=125mW, Min Operating Temperature=-55°C, Package Quantity=1, Resistance=10kR, Resistance Tolerance=1%, Resistor Type="Thick Film", Temperature Coefficient=100ppm/°C, Voltage Rating=150V, Case/Package=0805, Category="Chip SMD Resistors", Construction=Rectangular, Depth=1.25mm, Features="Moisture Resistant", Height=0.024inch, Lead Free="Lead Free", Length=0.079inch, Military Standard=Not, Number of Terminations=2, Packaging="Tape and Reel", Power Rating=125mW, Reach SVHC Compliant=Unknown, RoHS=Yes, RoHS Compliant=Yes, Series=RC, Size Code=0805, Stock 1=225000, Supplier 1=Rs, Technology="THICK FILM", Termination=SMD/SMT, Tolerance=1%, Width=0.049inch
R3 R8 R12 R16 R26: library part RES_1K_1/8W_1%_0805, "SMD Chip Resistor, 1 kOhm, ± 1%, 125 mW, 0805 [2012 Metric], Thick Film, General Purpose", Case Code (Imperial)=0805, Case Code (Metric)=2012, Manufacturer 1=Yageo, Manufacturer Part Number 1=RC0805FR-071KL, Max Operating Temperature=155°C, Max Power Dissipation=125mW, Min Operating Temperature=-55°C, Package Quantity=1, Resistance=1kR, Resistance Tolerance=1%, Resistor Type="Thick Film", Supplier Part Number 1=311-1.00KCRCT-ND, Temperature Coefficient=100ppm/°C, Voltage Rating=150V, Case/Package=0805, Category="Chip SMD Resistors", ComponentLink1Description=https://datasheet.ciiva.com/7941/1686128-7941719.pdf?src-supplier=Element14, ComponentLink1URL=https://datasheet.ciiva.com/7941/1686128-7941719.pdf?src-supplier=Element14, ComponentLink2Description=https://datasheet.ciiva.com/46385/444164-46385020.pdf?src-supplier=Element14, ComponentLink2URL=https://datasheet.ciiva.com/46385/444164-46385020.pdf?src-supplier=Element14, ComponentLink3Description=https://datasheet.ciiva.com/2456/pyu-r-int-thick-7-2456976.pdf?src-supplier=Digi-Key, ComponentLink3URL=https://datasheet.ciiva.com/2456/pyu-r-int-thick-7-2456976.pdf?src-supplier=Digi-Key, ComponentLink4Description=https://datasheet.ciiva.com/2456/pyu-r-int-thick-7-2456977.pdf?src-supplier=Digi-Key, ComponentLink4URL=https://datasheet.ciiva.com/2456/pyu-r-int-thick-7-2456977.pdf?src-supplier=Digi-Key, ComponentLink5Description=https://datasheet.ciiva.com/2456/pyu-r-int-thick-7-2456975.pdf?src-supplier=Digi-Key, ComponentLink5URL=https://datasheet.ciiva.com/2456/pyu-r-int-thick-7-2456975.pdf?src-supplier=Digi-Key, ComponentLink6Description=https://datasheet.ciiva.com/16850/rc0805-16850409.pdf?src-supplier=Future+Electronics, ComponentLink6URL=https://datasheet.ciiva.com/16850/rc0805-16850409.pdf?src-supplier=Future+Electronics, Construction=Rectangular, Depth=1.25mm, Features="Moisture Resistant", Height=0.024inch, Lead Free=5697LeadFree, Length=0.079inch, Military Standard=Not, Number of Pins=2, Number of Terminations=2, Packaging="Tape and Reel", Power Rating=125mW, Pricing 1="1=0.1, 10=0.024, 50=0.0152, 100=0.0127, 500=0.00866, 1000=0.00748 (USD)", Reach SVHC Compliant=No, RoHS=Yes, RoHS Compliant=Yes, Series=RC, Size Code=0805, Stock 1=5573569, Supplier 1=Digi-Key, Termination=SMD/SMT, Tolerance=1%, Voltage Rating (AC)=150V, Voltage Rating (DC)=150V, Width=0.049inch
R4 R10: library part RES_100K_1/8W_1%_0805, "SMD Chip Resistor, 100 kOhm, ± 1%, 125 mW, 0805 [2012 Metric], Thick Film, General Purpose", Manufacturer=Yageo, Manufacturer Part Number=RC0805FR-13100KL, Category="Chip SMD Resistors", ComponentLink1Description=https://datasheet.ciiva.com/5558/rc0805-5558047.pdf?src-supplier=Mouser, ComponentLink1URL=https://datasheet.ciiva.com/5558/rc0805-5558047.pdf?src-supplier=Mouser, Pricing 1="20000=0.0021, 80000=0.002, 300000=0.0019, 800000=0.0018, 2000000=0.0017 (USD)", RoHS=Yes, Stock 1=3620000, Supplier 1="Future Electronics"
R5 R11 R13 R19: library part RES_49.9R_1/4W_1%_1206, "SMD Chip Resistor, 49.9 Ohm, ± 1%, 250 mW, 1206 [3216 Metric], Thick Film, General Purpose", Manufacturer 1=Yageo, Manufacturer Part Number 1=RC1206FR-0749R9L, Supplier Part Number 1=311-49.9FRCT-ND, Category="Chip SMD Resistors", ComponentLink1Description=https://datasheet.ciiva.com/11819/0900766b80c6630a-11819940.pdf?src-supplier=Rs, ComponentLink1URL=https://datasheet.ciiva.com/11819/0900766b80c6630a-11819940.pdf?src-supplier=Rs, ComponentLink2Description=https://datasheet.ciiva.com/2557/pyu-rc1206-51-rohs-l-4-2557417.pdf?src-supplier=Digi-Key, ComponentLink2URL=https://datasheet.ciiva.com/2557/pyu-rc1206-51-rohs-l-4-2557417.pdf?src-supplier=Digi-Key, ComponentLink3Description=https://datasheet.ciiva.com/2557/pyu-rc1206-51-rohs-l-4-2557418.pdf?src-supplier=Digi-Key, ComponentLink3URL=https://datasheet.ciiva.com/2557/pyu-rc1206-51-rohs-l-4-2557418.pdf?src-supplier=Digi-Key, ComponentLink4Description=https://datasheet.ciiva.com/2557/pyu-rc1206-51-rohs-l-4-2557419.pdf?src-supplier=Digi-Key, ComponentLink4URL=https://datasheet.ciiva.com/2557/pyu-rc1206-51-rohs-l-4-2557419.pdf?src-supplier=Digi-Key, Pricing 1="1=0.1, 10=0.036, 50=0.0232, 100=0.0195, 500=0.01364, 1000=0.01187 (USD)", RoHS=Yes, Stock 1=996807, Supplier 1=Digi-Key